# Altium PCB vt18_main_board.PcbDoc (part 1 of 2)
Units mil, origin at the board's own origin, x right, y up, seen from the top; angles counter-clockwise.
Board outline 5511.81 x 5236.22 mil, 4 copper layers (Top Layer, Internal Plane 1, Internal Plane 2, Bottom Layer), stack 30.635 mil thick; 230 components, 148 nets, 952 pads, 623 vias.
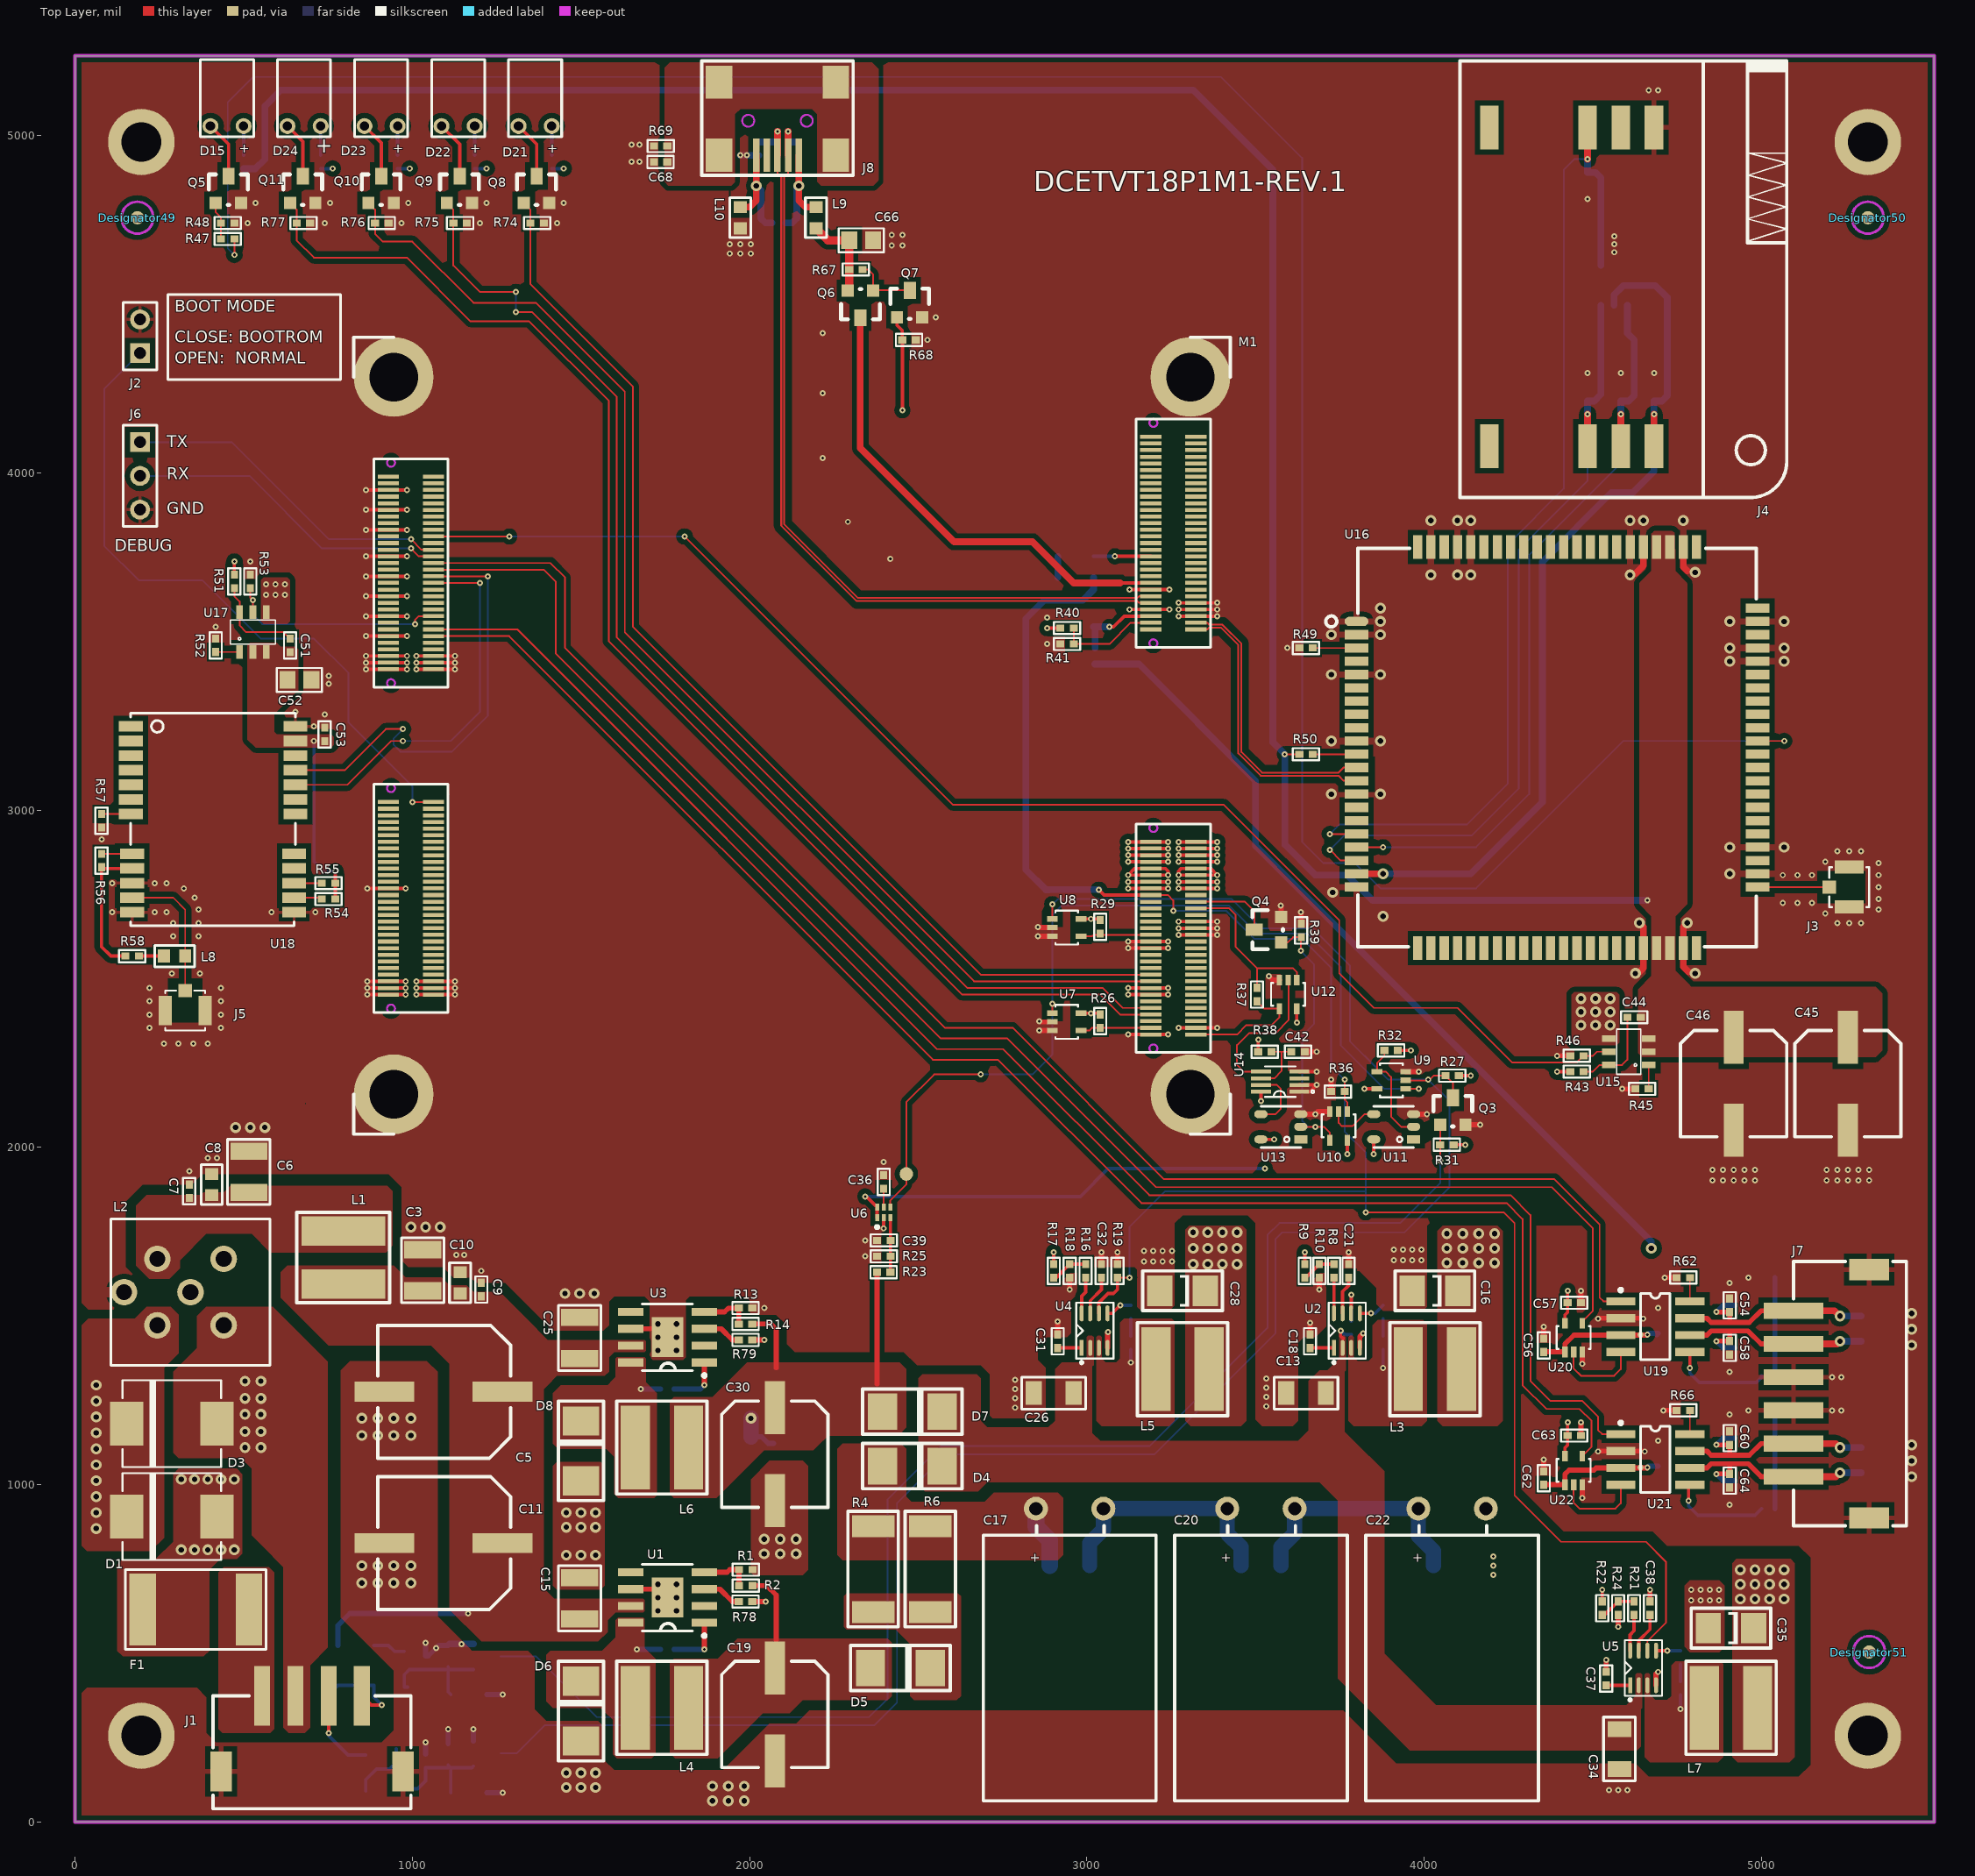
[diagram p0: Top Layer view]
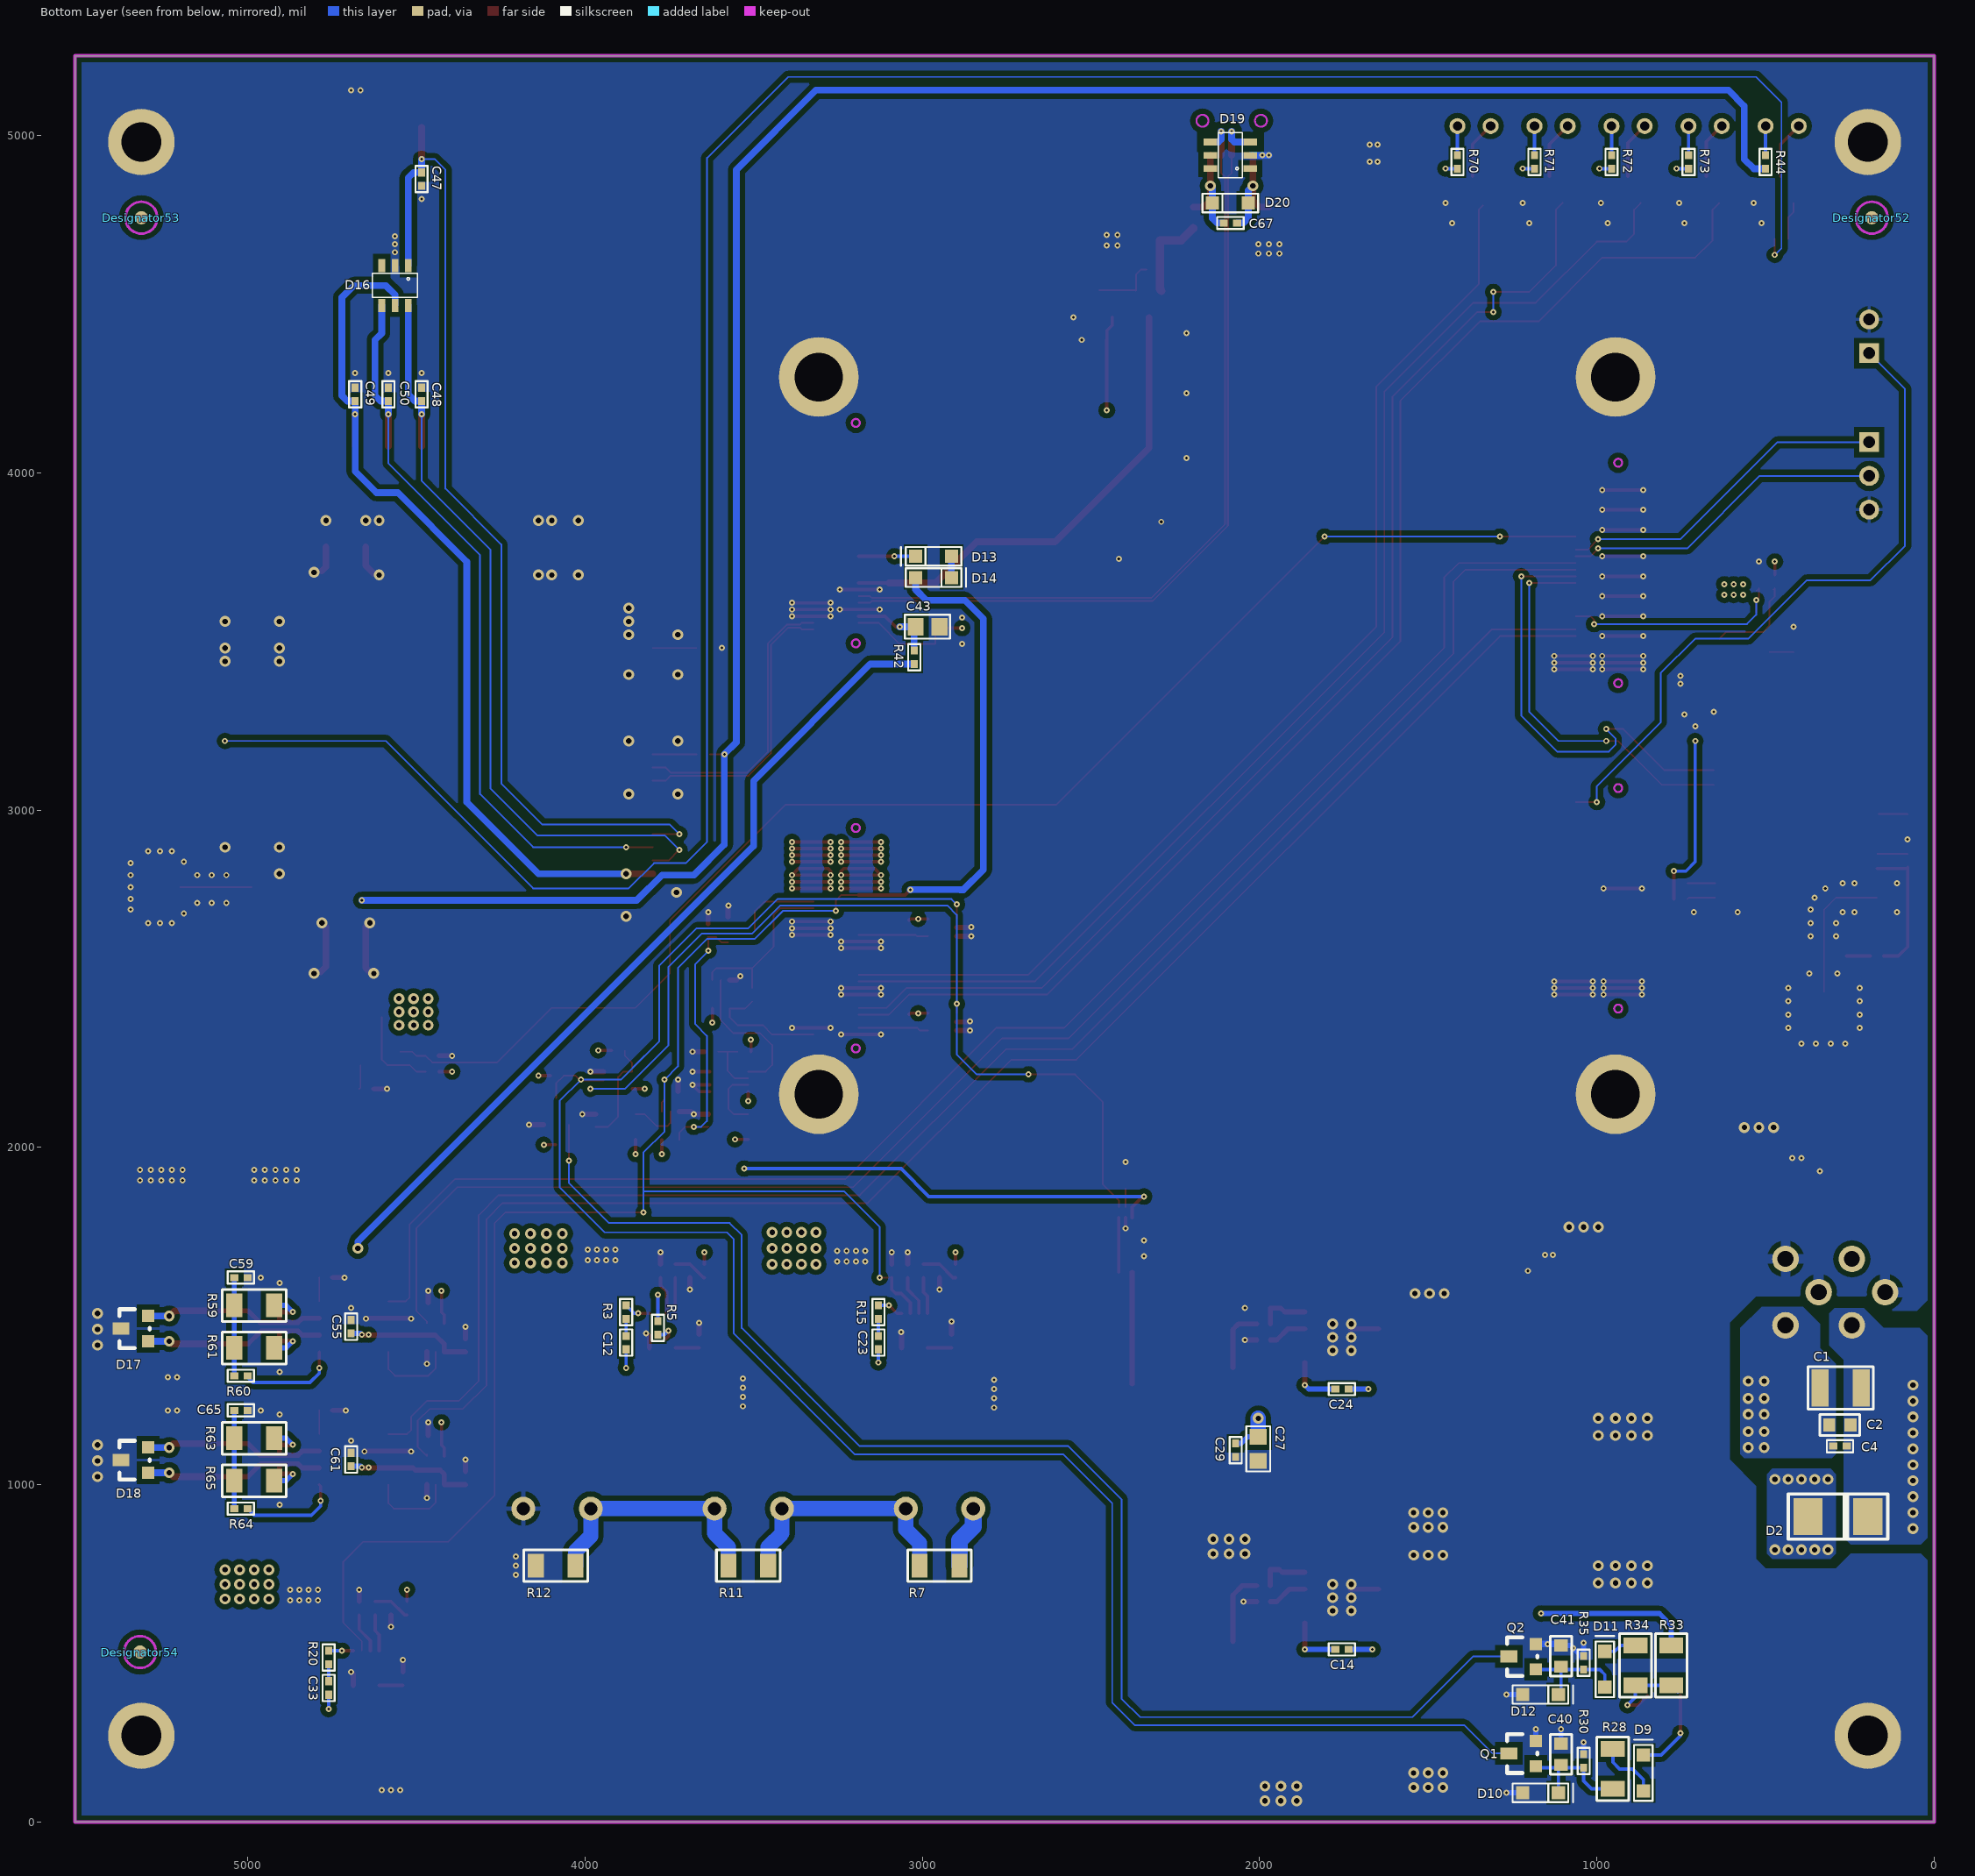
[diagram p1: Bottom Layer view, seen from below]
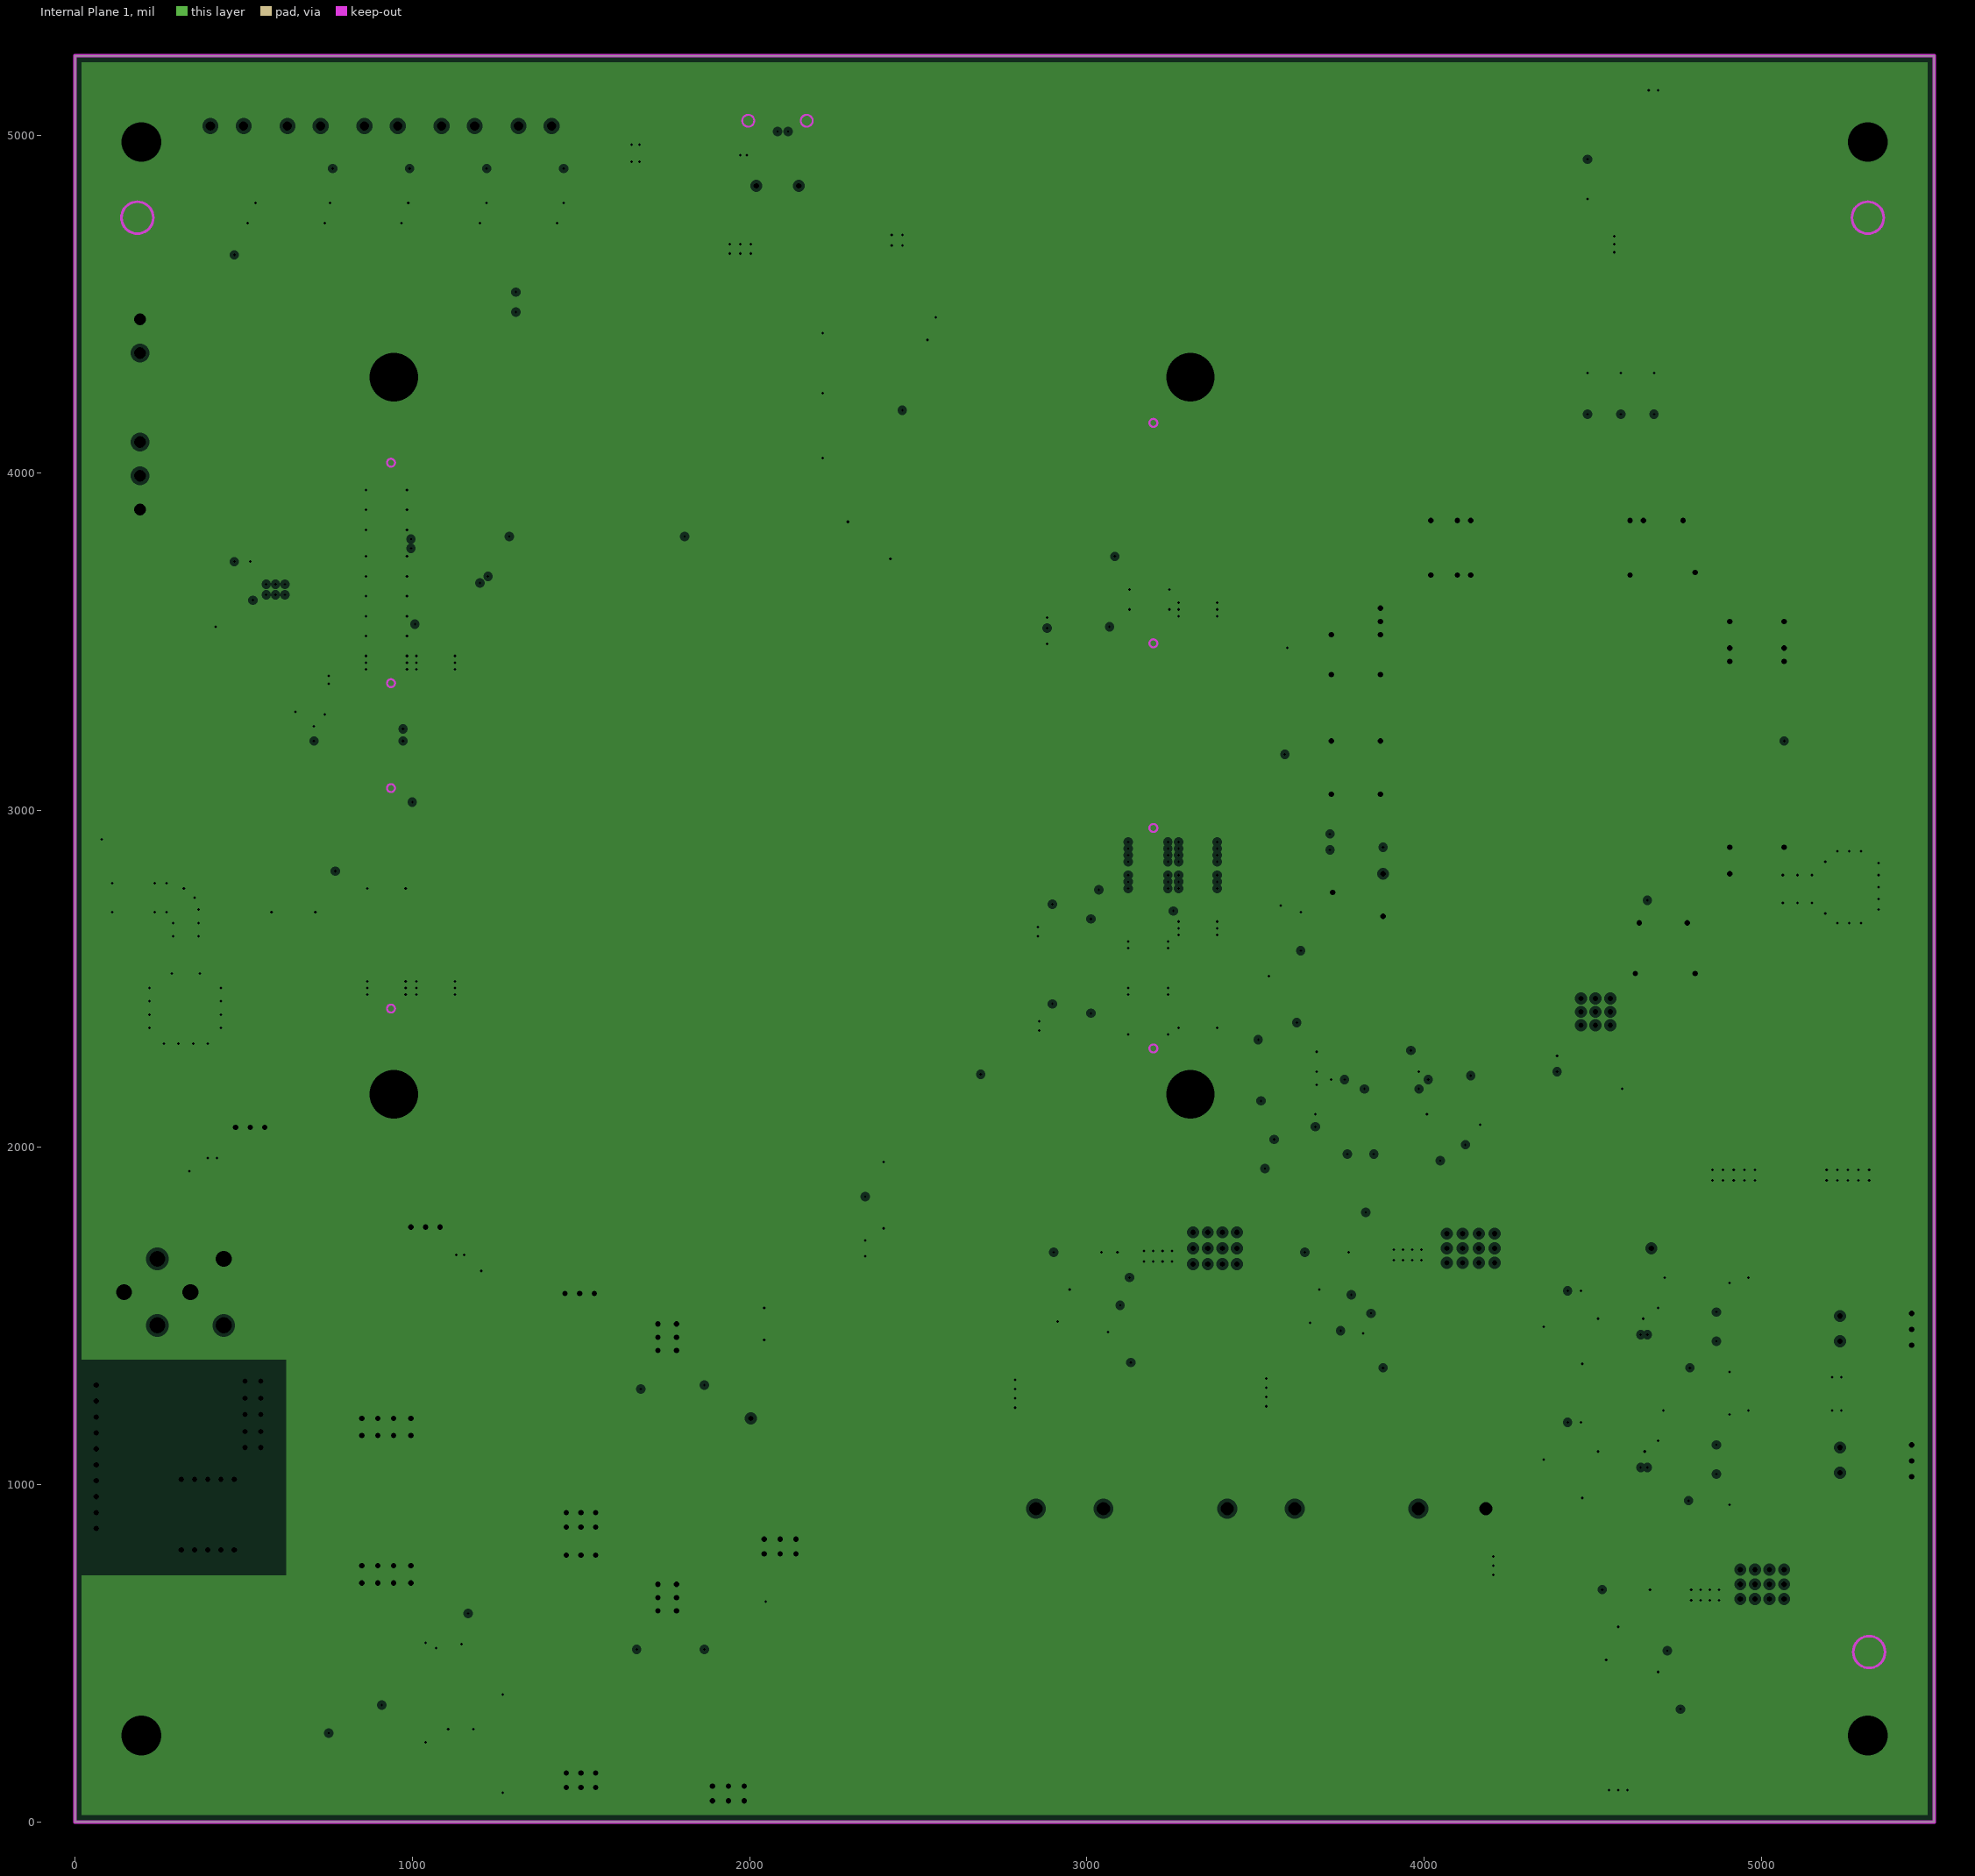
[diagram p2: Internal Plane 1, clearances drawn from the general rule]
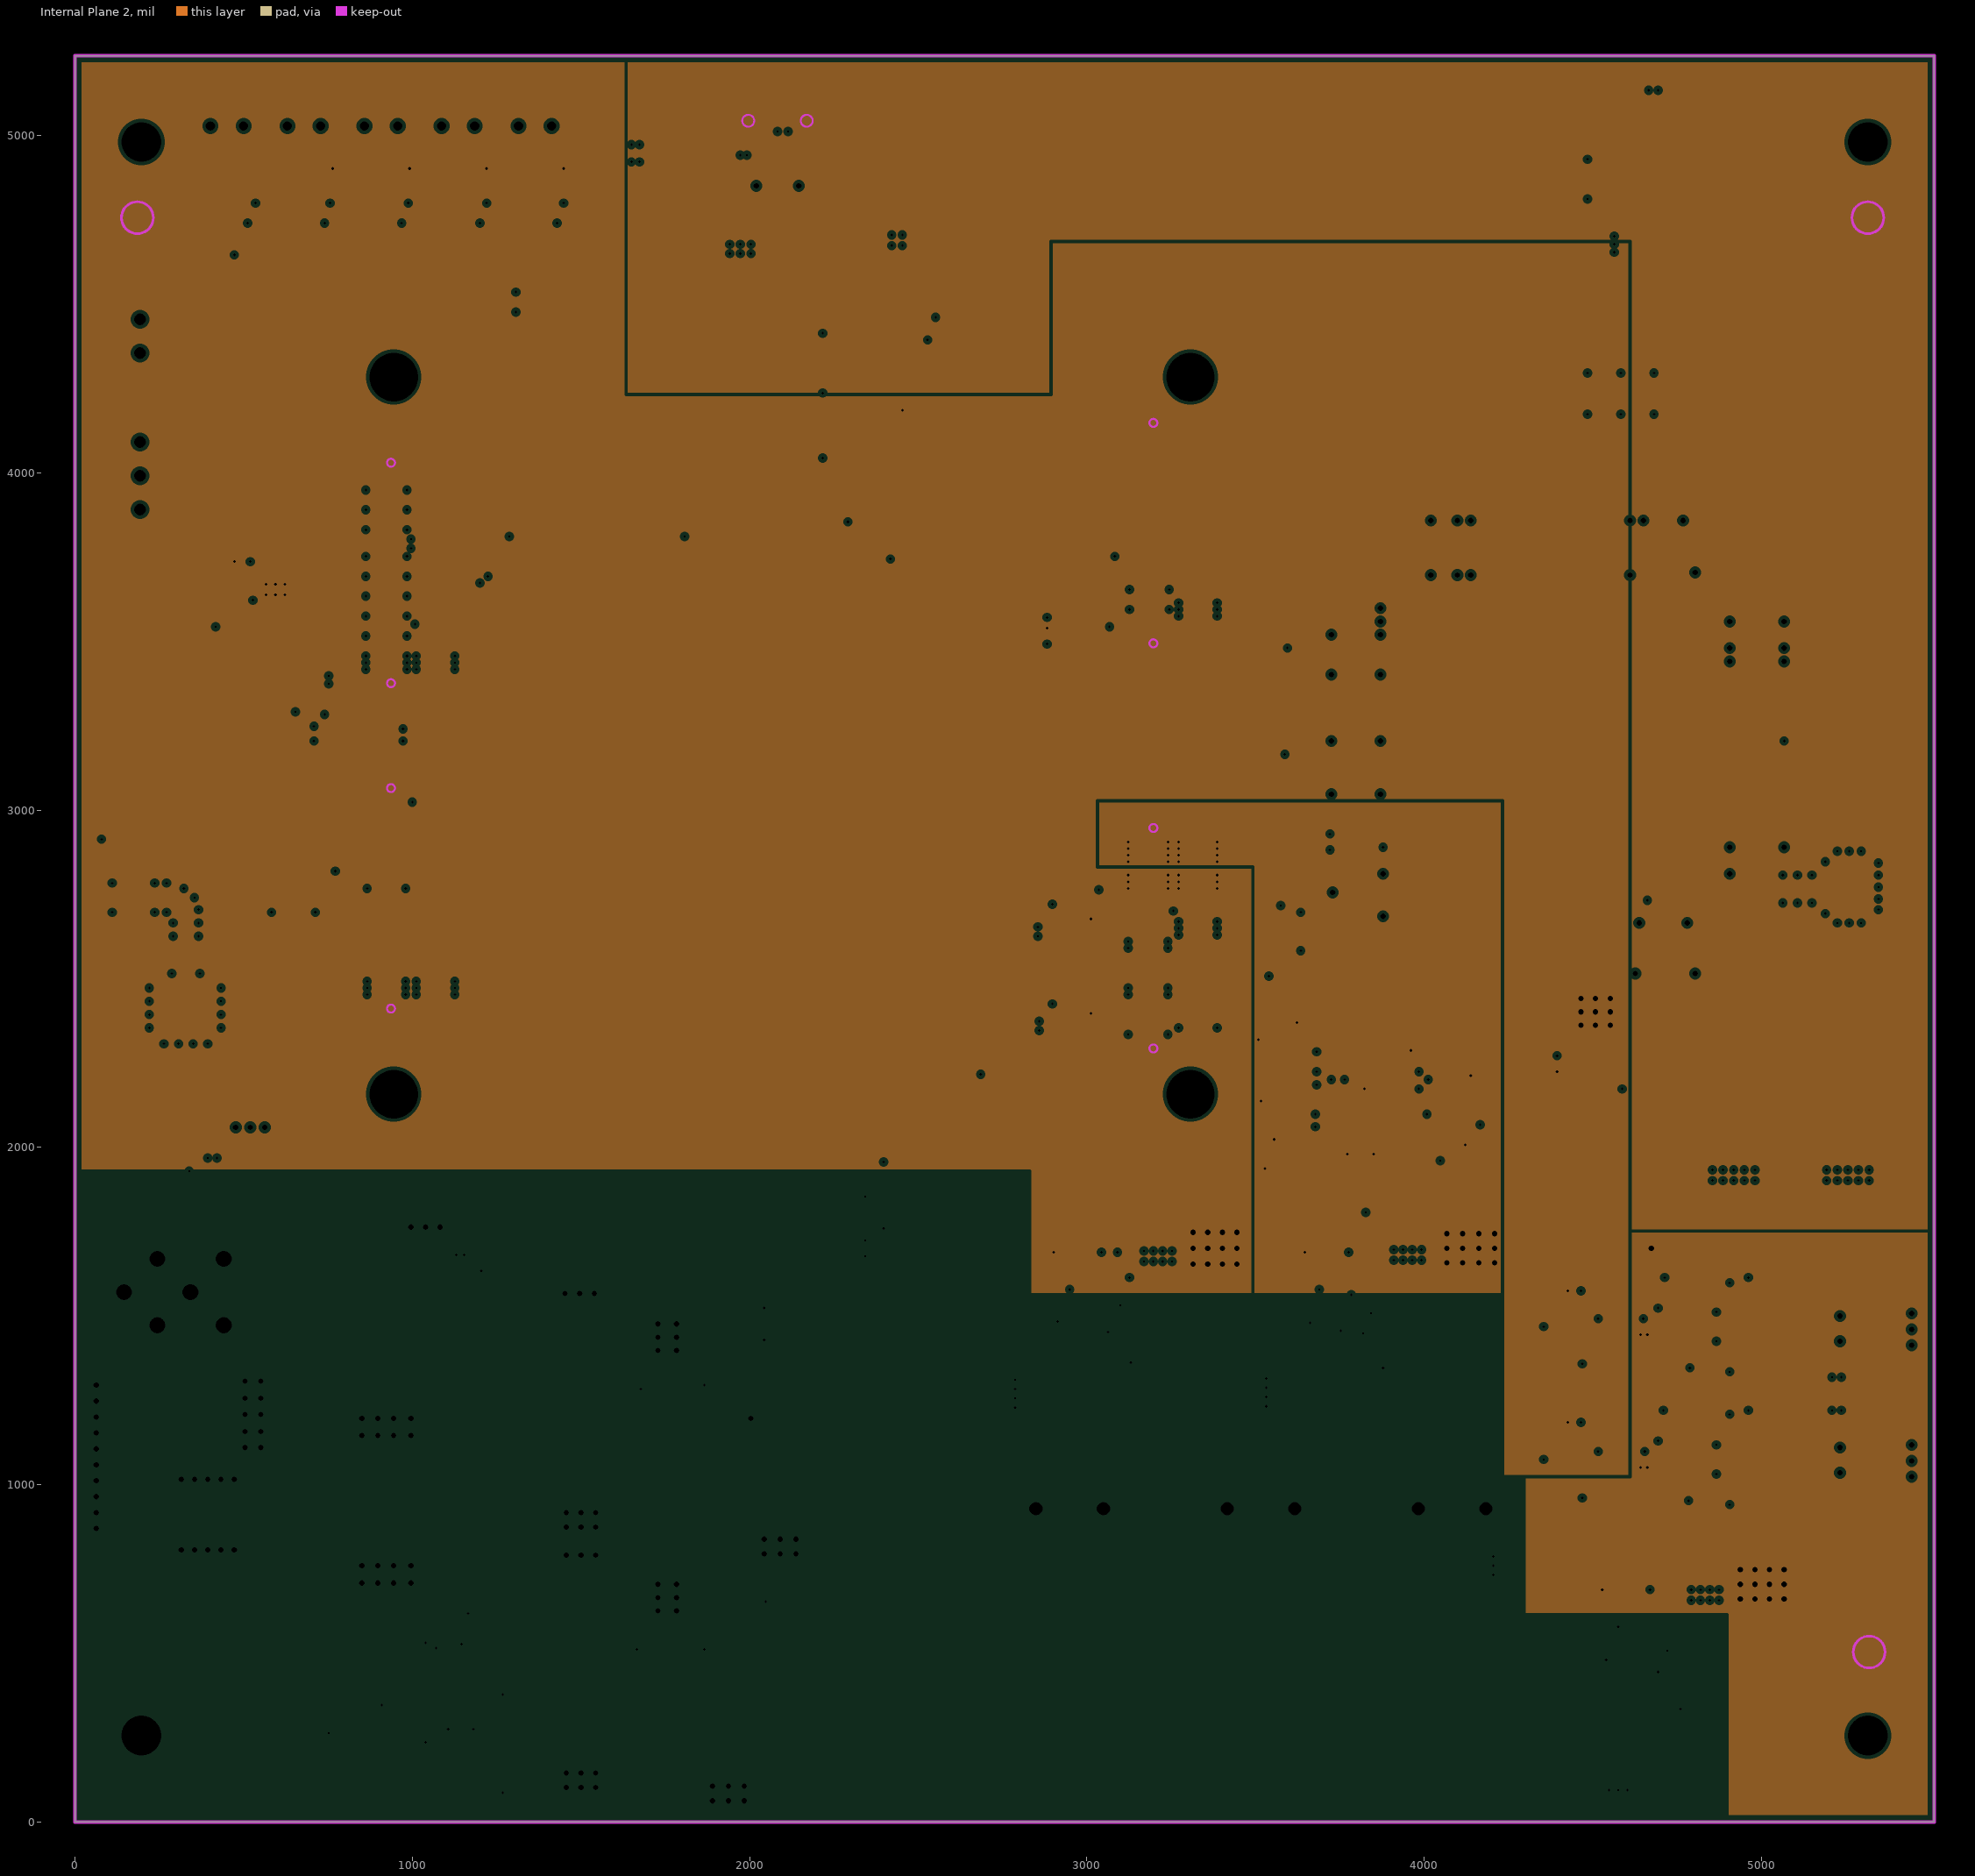
[diagram p3: Internal Plane 2, clearances drawn from the general rule]

## Layer stack, top to bottom
Top Solder: solder mask 0.4, Solder Resist, Dk 3.5
Top Layer: signal copper 1.4
Dielectric 1: core 10, FR-4, Dk 4.2
Internal Plane 1: plane copper 1.4173
Dielectric 3: prepreg 5, Dk 4.2
Internal Plane 2: plane copper 1.4173
Dielectric 2: core 10, Dk 4.2
Bottom Layer: signal copper 1.4
Bottom Solder: solder mask 0.4, Solder Resist, Dk 3.5

## Board outline
0,0 0,5236.22 5511.81,5236.22 5511.81,0

## Design rules (kind name [scope] priority, off if disabled: settings)
Clearance Clearance_5 [InNet('OTG_N') vs InNet('OTG_P')] p1: gap=3.7
Clearance Clearance_4 [InNet('USB-HOST_N') vs InNet('USB-HOST_P')] p2: gap=3.7
Clearance Clearance_3 [InDifferentialPairClass('USB') vs InPolygon AND InNet('GND')] p3: gap=20
Clearance Clearance_2 [InPolygon AND InNet('GND') vs InComponent('L1')] p4: gap=25
Clearance Clearance_1 [InPolygon AND InNet('GND')] p5: gap=15
Clearance [All] p6: gap=5
ComponentClearance [All] p1: gap=0 collisioncheckmode=3 verticalgap=0 showdistances=FALSE
DiffPairsRouting DiffPairsRouting_1 [InDifferentialPairClass('CAN')] p1: maxlimit=10 minlimit=10 mostfreqgap=10 toplayer_minwidth=10 toplayer_maxwidth=20 toplayer_prefwidth=15 bottomlayer_minwidth=10 bottomlayer_maxwidth=20 bottomlayer_prefwidth=15 maxuncoupledlength=500
DiffPairsRouting [InDifferentialPairClass('USB')] p2: maxlimit=3.7 minlimit=3.7 mostfreqgap=3.7 toplayer_minwidth=5.3 toplayer_maxwidth=5.3 toplayer_prefwidth=5.3 bottomlayer_minwidth=5.3 bottomlayer_maxwidth=5.3 bottomlayer_prefwidth=5.3 maxuncoupledlength=500
MinimumSolderMaskSliver [All] p1: minsoldermaskwidth=0
PlaneClearance PlaneClearance_2 [InComponent('L2')] p1: clearance=40
PlaneClearance PlaneClearance_1 [InPadClass('MT')] p2: clearance=39.37
PlaneClearance [All] p3: clearance=10
PlaneConnect PlaneConnect_4 [InComponent('L2')] p1: planeconnectstyle=Relief reliefexpansion=20 reliefentries=4 reliefconductorwidth=20 reliefairgap=20
PlaneConnect PlaneConnect_3 [InPadClass('MT')] p2: planeconnectstyle=Direct reliefexpansion=20 reliefentries=4 reliefconductorwidth=10 reliefairgap=10
PlaneConnect PlaneConnect_1 [IsVia] p3: planeconnectstyle=Direct reliefexpansion=20 reliefentries=4 reliefconductorwidth=10 reliefairgap=10
PlaneConnect [All] p4: planeconnectstyle=Relief reliefexpansion=10 reliefentries=4 reliefconductorwidth=10 reliefairgap=20
PolygonConnect PolygonConnect_5 [InComponent('C22') OR InComponent('J4') OR (InComponent('J1') AND NOT InNet('PGND')) OR InComponent('J7')] p1: connectstyle=Relief reliefconductorwidth=15 reliefentries=4 polygonreliefangle="90 Angle" airgapwidth=15
PolygonConnect PolygonConnect_4 [InComponent('J2') OR InComponent('J6') OR InComponent('D15') OR InComponent('D24') OR InComponent('D23') OR InComponent('D22') OR InComponent('D21')] p2: connectstyle=Relief reliefconductorwidth=10 reliefentries=4 polygonreliefangle="90 Angle" airgapwidth=10
PolygonConnect PolygonConnect_3 [InComponent('U16') AND NOT(InNet('M3V3'))] p3: connectstyle=Relief reliefconductorwidth=20 reliefentries=4 polygonreliefangle="90 Angle" airgapwidth=15
PolygonConnect PolygonConnect_2 [InComponent('U18')] p4: connectstyle=Relief reliefconductorwidth=10 reliefentries=4 polygonreliefangle="90 Angle" airgapwidth=10
PolygonConnect PolygonConnect_1 [InComponent('L2') vs (Not InNet('NetC1_1')) AND (NOT InNet('PGND')) AND  (NOT InNet('NetC6_1'))] p5: connectstyle=Relief reliefconductorwidth=30 reliefentries=4 polygonreliefangle="90 Angle" airgapwidth=15
PolygonConnect [All] p6: connectstyle=Direct reliefconductorwidth=10 reliefentries=4 polygonreliefangle="90 Angle" airgapwidth=10
RoutingVias [All] p1: holewidth=8 width=18 viastyle="Through Hole" minholewidth=8 minwidth=18 maxholewidth=20 maxwidth=40
SilkToSilkClearance [All] p1: silktosilkclearance=0
SilkToSolderMaskClearance [IsPad] p1: minsilkscreentomaskgap=0 clearancetoexposedcopper=TRUE
SolderMaskExpansion [All] p1: expansion=4
Width [All] p1: maxlimit=200 minlimit=4.7 preferedwidth=5 minimp=50.000000 maximp=50.000000 favimp=50.000000
23 further rules are at their usual default settings.

## Classes and differential pairs
pad class MT: Free-MT1 Free-MT2 Free-MT3 Free-MT4 M1-MT5 M1-MT6 M1-MT7 M1-MT8
differential pair class CAN: CAN1 CAN2
differential pair class USB: OTG USB-HOST
component class 01-POWER-FILTER: C1 C2 C3 C4 C5 C6 C7 C8 C9 C10 C11 D1 D2 D3 F1 J1 L1 L2
component class 02-POWER: C12 C13 C14 C15 C16 C17 C18 C19 C20 C21 C22 C23 C24 C25 C26 C27 C28 C29 C30 C31 C32 C33 C34 C35 C36 C37 C38 C39 D4 D5 D6 D7 D8 L3 L4 L5 L6 L7 R1 R2 R3 R4 R5 R6 R7 R8 R9 R10 R11 R12 R13 R14 R15 R16 R17 R18 R19 R20 R21 R22 R23 R24 R25 R26 R78 R79 U1 U2 U3 U4 U5 U6 U7
component class 03-POWER_CTRL: C40 C41 C42 D9 D10 D11 D12 Q1 Q2 Q3 Q4 R27 R28 R29 R30 R31 R32 R33 R34 R35 R36 R37 R38 R39 U8 U9 U10 U11 U12 U13 U14
component class 04-CPU_BOARD: C43 D13 D14 J2 M1 R40 R41 R42
component class 05-MODEM: C44 C45 C46 C47 C48 C49 C50 D15 D16 J3 J4 Q5 R43 R44 R45 R46 R47 R48 R49 R50 U15 U16
component class 06-GPS: C51 C52 C53 J5 L8 R51 R52 R53 R54 R55 R56 R57 R58 U17 U18
component class 07-CAN&UART: C54 C55 C56 C57 C58 C59 C60 C61 C62 C63 C64 C65 D17 D18 J6 J7 R59 R60 R61 R62 R63 R64 R65 R66 U19 U20 U21 U22
component class 08-USB: C66 C67 C68 D19 D20 J8 L9 L10 Q6 Q7 R67 R68 R69
component class 09-LED: D21 D22 D23 D24 Q8 Q9 Q10 Q11 R70 R71 R72 R73 R74 R75 R76 R77
differential pair CAN1: +CAN1_P -CAN1_N
differential pair CAN2: +CAN2_P -CAN2_N
differential pair OTG: +OTG_P -OTG_N
differential pair USB-HOST: +USB-HOST_P -USB-HOST_N

## Components (designator, comment, footprint, x,y, rotation, side; value= is the part's Value field where it differs from the comment)
C1 "10uF/50V" 1210 216.54,1287.4 r0 bottom
C2 "0.22uF/50V" 0603 279.53,1177.17 r270 bottom
C3 "10uF/50V" 1210 1031.5,1574.8 r90 top
C4 "1000pF/50V" 0402 279.53,1114.17 r180 bottom
C5 "220uF/50V" DL-10*10.5 1094.49,1275.59 r270 top
C6 "10uF/50V" 1210 515.75,1866.14 r90 top
C7 "1000pF/50V" 0402 338.58,1870.08 r270 top
C8 "0.22uF/50V" 0603 405.51,1889.76 r180 top
C9 "1000pF/50V" 0402 1204.72,1578.74 r270 top
C10 "0.22uF/50V" 0603 1141.73,1598.43 r180 top
C11 "220uF/50V" DL-10*10.5 1094.49,826.77 r270 top
C12 "0.1uF/50V" 0402 3877.95,1421.26 r270 bottom
C13 "10uF/16V" 1206 3590.55,1271.65 r0 top
C14 "0.01uF/50V" 0402 1755.91,511.81 r180 bottom
C15 "10uF/50V" 1210 1496.06,602.36 r90 top
C16 "47uF/10V(tan)" 3528 4031.5,1574.8 r0 top
C17 "10F/2.7V" SUPERCAP 2948.82,929.13 r0 top
C18 "0.022uF/50V" 0402 3661.42,1425.2 r90 top
C19 "220uF/25V" DL-8*10.5 2074.8,318.9 r0 top
C20 "10F/2.7V" SUPERCAP 3515.75,929.13 r0 top
C21 "0.1uF/50V" 0402 3775.59,1633.86 r90 top
C22 "10F/2.7V" SUPERCAP 4082.68,929.13 r0 top
C23 "0.1uF/50V" 0402 3129.92,1421.26 r270 bottom
C24 "0.01uF/50V" 0402 1755.91,1283.46 r180 bottom
C25 "10uF/50V" 1210 1496.06,1374.02 r90 top
C26 "10uF/16V" 1206 2842.52,1271.65 r0 top
C27 "4.7uF/25V" 0805 2003.94,1070.87 r90 bottom
C28 "47uF/10V(tan)" 3528 3283.46,1574.8 r0 top
C29 "0.22uF/16V" 0402 2070.87,1102.36 r270 bottom
C30 "220uF/25V" DL-8*10.5 2074.8,1090.55 r0 top
C31 "0.022uF/50V" 0402 2913.39,1425.2 r90 top
C32 "0.1uF/50V" 0402 3043.31,1633.86 r90 top
C33 "0.1uF/50V" 0402 4759.84,397.45 r270 bottom
C34 "10uF/16V" 1206 4578.74,157.48 r90 top
C35 "47uF/10V(tan)" 3528 4909.45,574.8 r0 top
C36 "0.1uF/50V" 0402 2397.64,1897.64 r270 top
C37 "0.022uF/50V" 0402 4539.37,425.2 r90 top
C38 "0.1uF/50V" 0402 4669.29,633.86 r90 top
C39 "0.01uF/50V" 0402 2397.64,1724.41 r0 top
C40 "0.47uF/50V" 0603 1106.3,200.79 r0 bottom
C41 "0.47uF/50V" 0603 1106.3,492.13 r0 bottom
C42 "0.22uF/10V" 0402 3625.98,2283.46 r180 top
C43 "4.7uF/25V" 0805 3019.68,3543.31 r180 bottom
C44 "1uF/10V" 0402 4622.05,2385.83 r0 top
C45 "470uF/6.3V" DL-8*10.5 5255.91,2188.98 r0 top
C46 "470uF/6.3V" DL-8*10.5 4917.32,2188.98 r0 top
C47 "33pF/50V" 0402 4484.25,4870.08 r90 bottom
C48 "33pF/50V" 0402 4484.25,4232.28 r270 bottom
C49 "0.1uF/50V" 0402 4681.1,4232.28 r270 bottom
C50 "33pF/50V" 0402 4582.68,4232.28 r270 bottom
C51 "0.47uF/6.3V" 0402 637.8,3488.19 r270 top
C52 "10uF/10V" 0805 629.92,3385.83 r0 top
C53 "0.1uF/50V" 0402 740.16,3224.41 r270 top
C54 "56pF/50V" 0402 4905.51,1531.5 r90 top
C55 "0.1uF/50V" 0402 4692.91,1468.5 r270 bottom
C56 "0.1uF/50V" 0402 4354.33,1413.39 r270 top
C57 "0.1uF/50V" 0402 4444.88,1539.37 r180 top
C58 "56pF/50V" 0402 4905.51,1405.51 r90 top
C59 "1000pF(DNP)" 0402 5019.68,1614.17 r0 bottom
C60 "56pF/50V" 0402 4905.51,1137.8 r90 top
C61 "0.1uF/50V" 0402 4692.91,1074.8 r270 bottom
C62 "0.1uF/50V" 0402 4354.33,1019.69 r270 top
C63 "0.1uF/50V" 0402 4444.88,1145.67 r180 top
C64 "56pF/50V" 0402 4905.51,1011.81 r90 top
C65 "1000pF(DNP)" 0402 5019.68,1220.47 r0 bottom
C66 "10uF/10V" 0805 2366.14,4688.98 r180 top
C67 "0.1uF/50V" 0402 2086.61,4740.16 r180 bottom
C68 "0.1uF/50V" 0402 1736.22,4921.26 r180 top
D1 "SMDJ33CA" SMC 421.26,905.51 r0 top
D2 "MBRS260T3G" SMB 374.02,905.51 r180 bottom
D3 "5.0SMDJ36A" SMC 421.26,1181.1 r0 top
D4 "MBRS260T3G" SMB 2393.7,1055.12 r0 top
D5 "MBRS260T3G" SMB 2358.27,456.69 r0 top
D6 "MBRS260T3G" SMB 1500,240.16 r90 top
D7 "MBRS260T3G" SMB 2393.7,1216.54 r0 top
D8 "MBRS260T3G" SMB 1500,1011.81 r90 top
D9 "MM3Z6V2ST1G" SOD323F 862.2,145.67 r270 bottom
D10 "1N5819HW" 1N5819 1114.17,86.61 r0 bottom
D11 "MM3Z6V2ST1G" SOD323F 976.38,452.76 r270 bottom
D12 "1N5819HW" 1N5819 1114.17,377.95 r0 bottom
D13 "1N5819HW" 1N5819 3019.68,3751.97 r180 bottom
D14 "1N5819HW" 1N5819 2913.39,3688.98 r0 bottom
D15 "LED GREEN" LED-3MM 401.57,5027.56 r0 top locked
D16 "SRV05-4" SOT23-6 4523.62,4614.17 r0 bottom
D17 "PESD1CAN" PESD2CAN 5295.28,1425.2 r90 bottom
D18 "PESD1CAN" PESD2CAN 5295.28,1035.43 r90 bottom
D19 "SRV05-4" SOT23-6 2027.56,4901.57 r90 bottom
D20 "PESD5V0L1BA" SOD323 2086.61,4799.21 r0 bottom
D21 "LED GREEN" LED-3MM 1314.96,5027.56 r0 top locked
D22 "LED GREEN" LED-3MM 1086.61,5027.56 r0 top locked
D23 "LED GREEN" LED-3MM 858.27,5027.56 r0 top locked
D24 "LED GREEN" LED-3MM 629.92,5027.56 r0 top locked
Designator49 "Comment" MARK 185.04,4755.91 r0 top locked
Designator50 "Comment" MARK 5314.96,4755.91 r0 top locked
Designator51 "Comment" MARK 5318.9,503.94 r0 top locked
Designator52 "Comment" MARK 185.04,4755.91 r180 bottom locked
Designator53 "Comment" MARK 5314.96,4755.91 r180 bottom locked
Designator54 "Comment" MARK 5318.9,503.94 r180 bottom locked
F1 "1.85A/33V" 2920 200.79,629.92 r0 top
J1 "POWER IN" XH2.54-SMT-V-4P 555.12,374.02 r0 top
J2 "BOOT MODE" HDR1X2 192.91,4354.33 r90 top
J3 "MODEM ANT" ANT 5259.84,2771.65 r270 top
J4 "SIMCARD" SIM_CARD1 4681.1,4078.74 r270 top locked
J5 "GPS ANT" ANT 326.77,2405.51 r180 top
J6 "DEBUG UART" HDR1X3 192.91,4090.55 r270 top
J7 "CAN" XH2.54-SMT-V-6P 5094.49,1023.62 r90 top
J8 "USB OTG" MINIUSB-TYPEAB 2082.68,4940.94 r0 top locked
L1 "8.2uH/1.6A" IND-SMD-5.8*5.8 795.28,1673.23 r0 top
L2 "BNX003-01" BNX002-001 342.52,1570.87 r180 top
L3 "4.7uH/2A" IND-SMD-5.8*5.8 4031.5,1342.52 r90 top
L4 "8.2uH/1.6A" IND-SMD-5.8*5.8 1740.16,338.58 r90 top
L5 "4.7uH/2A" IND-SMD-5.8*5.8 3283.46,1342.52 r90 top
L6 "8.2uH/1.6A" IND-SMD-5.8*5.8 1740.16,1110.24 r90 top
L7 "4.7uH/2A" IND-SMD-5.8*5.8 4909.45,338.58 r90 top
L8 "27nH(DNP)" 0603 295.28,2566.93 r90 top
L9 "120ohm/100MHz 1A" 0603 2196.85,4755.91 r180 top
L10 "120ohm/100MHz 1A" 0603 1972.44,4755.91 r180 top
M1 "IMX6Q-CPU-BOARD" IMX6-CPU-BOARD 826.77,2039.37 r0 top locked
Q1 "S9014" NPN 1181.1,165.35 r90 bottom
Q2 "S9014" NPN 1181.1,452.76 r90 bottom
Q3 "S9014" NPN 4047.24,2066.93 r0 top
Q4 "BSS138P" NPN 3576.06,2607.67 r90 top
Q5 "S9014" NPN 417.32,4799.21 r0 top
Q6 "IRLML6402" MOSFET 2366.14,4539.37 r180 top
Q7 "BSS138P" NPN 2437.01,4460.63 r0 top
Q8 "BSS138P" NPN 1330.71,4799.21 r0 top
Q9 "BSS138P" NPN 1102.36,4799.21 r0 top
Q10 "BSS138P" NPN 870.08,4799.21 r0 top
Q11 "BSS138P" NPN 637.8,4799.21 r0 top
R1 "1K/1%" 0402 1988.63,748.03 r180 top
R2 "5.23K/1%" 0402 1988.63,700.79 r180 top
R3 "10" 0402 3877.95,1511.81 r270 bottom
R4 "20/1W" 2512 2366.14,622.05 r90 top
R5 "100K" 0402 3783.46,1464.57 r90 bottom
R6 "20/1W" 2512 2535.43,622.05 r90 top
R7 "560/0.25W" 1206 2889.76,759.84 r0 bottom
R8 "33K/1%" 0402 3732.28,1633.86 r90 top
R9 "40.2K/1%" 0402 3645.67,1633.86 r90 top
R10 "13K/1%" 0402 3688.98,1633.86 r90 top
R11 "560/0.25W" 1206 3456.69,759.84 r0 bottom
R12 "560/0.25W" 1206 4027.56,759.84 r0 bottom
R13 "1K/1%" 0402 1988.19,1523.62 r180 top
R14 "5.62K/1%" 0402 1988.19,1476.38 r180 top
R15 "10" 0402 3129.92,1511.81 r270 bottom
R16 "33K/1%" 0402 2996.06,1633.86 r90 top
R17 "40.2K/1%" 0402 2901.57,1633.86 r90 top
R18 "13K/1%" 0402 2948.82,1633.86 r90 top
R19 "10K" 0402 3090.55,1633.86 r270 top
R20 "10" 0402 4759.84,488 r270 bottom
R21 "33K/1%" 0402 4622.05,633.86 r90 top
R22 "40.2K/1%" 0402 4527.56,633.86 r90 top
R23 "13K/1%" 0402 2397.64,1629.92 r180 top
R24 "7.68K/1%" 0402 4574.8,633.86 r90 top
R25 "1K/1%" 0402 2397.64,1677.17 r0 top
R26 "10K" 0402 3039.37,2374.02 r90 top
R27 "47K" 0402 4082.68,2212.6 r0 top
R28 "15K(0.25W)" 1206 952.76,98.43 r90 bottom
R29 "10K" 0402 3039.37,2653.54 r90 top
R30 "47K" 0402 1039.37,181.1 r270 bottom
R31 "10K" 0402 4066.93,2007.87 r0 top
R32 "10K" 0402 3901.57,2287.4 r0 top
R33 "10K(0.25W)" 1206 779.53,523.62 r270 bottom
R34 "10K(0.25W)" 1206 885.83,405.51 r90 bottom
R35 "47K" 0402 1039.37,472.44 r270 bottom
R36 "10K" 0402 3744.09,2165.35 r0 top
R37 "0(DNP)" 0402 3503.94,2452.76 r90 top
R38 "10K" 0402 3527.56,2283.46 r180 top
R39 "4.7K" 0402 3635.12,2643.1 r270 top
R40 "4.7K" 0402 2940.94,3539.37 r0 top
R41 "0(DNP)" 0402 2940.94,3492.13 r0 top
R42 "0" 0402 3023.62,3452.76 r90 bottom
R43 "47K" 0402 4452.57,2224.41 r180 top
R44 "200" 0402 500,4921.26 r270 bottom
R45 "3.3K" 0402 4645.67,2173.23 r180 top
R46 "2.2K" 0402 4452.57,2271.65 r180 top
R47 "4.7K" 0402 452.76,4692.91 r0 top
R48 "47K" 0402 452.76,4740.16 r0 top
R49 "0" 0402 3649.61,3480.31 r180 top
R50 "0" 0402 3649.61,3165.35 r180 top
R51 "20K" 0402 472.44,3677.35 r90 top
R52 "1K" 0402 417.32,3488.19 r90 top
R53 "2.2K" 0402 519.68,3677.35 r90 top
R54 "0(DNP)" 0402 751.97,2736.22 r180 top
R55 "0(DNP)" 0402 751.97,2783.46 r180 top
R56 "0" 0402 78.74,2850.39 r270 top
R57 "0(DNP)" 0402 78.74,2968.5 r270 top
R58 "10(DNP)" 0402 169.29,2566.93 r0 top
R59 "62/(1/4W)(DNP)" 1206 4921.26,1531.5 r0 bottom
R60 "0(DNP)" 0402 5019.68,1322.83 r0 bottom
R61 "62(1/4W)(DNP)" 1206 5039.37,1405.51 r180 bottom
R62 "0" 0402 4767.72,1614.17 r0 top
R63 "62/(1/4W)" 1206 4921.26,1137.8 r0 bottom
R64 "0(DNP)" 0402 5019.68,929.13 r0 bottom
R65 "62(1/4W)" 1206 5039.37,1011.81 r180 bottom
R66 "0" 0402 4767.72,1220.47 r0 top
R67 "47K" 0402 2314.96,4602.36 r0 top
R68 "47K" 0402 2472.44,4393.7 r0 top
R69 "100" 0402 1736.22,4968.5 r0 top
R70 "200" 0402 1413.39,4921.26 r270 bottom
R71 "200" 0402 1185.04,4921.26 r270 bottom
R72 "200" 0402 956.69,4921.26 r270 bottom
R73 "200" 0402 728.35,4921.26 r270 bottom
R74 "4.7K" 0402 1370.08,4740.16 r0 top
R75 "4.7K" 0402 1141.73,4740.16 r0 top
R76 "4.7K" 0402 909.45,4740.16 r0 top
R77 "4.7K" 0402 677.17,4740.16 r0 top
R78 "DNP" 0402 1988.19,653.54 r180 top
R79 "DNP" 0402 1988.19,1429.13 r180 top
U1 "LM22676MR-ADJ" PSO8 1866.14,590.55 r90 top
U2 "MP1497DJ" TSOT23-8 3732.28,1405.51 r90 top
U3 "LM22676MR-ADJ" PSO8 1866.14,1362.2 r90 top
U4 "MP1497DJ" TSOT23-8 2984.25,1405.51 r90 top
U5 "MP1497DJ" TSOT23-8 4610.24,405.51 r90 top
U6 "TPS3895P" SON 2377.95,1791.34 r0 top
U7 "NC7SP125P5X" SC70 2897.64,2397.64 r270 top
U8 "NC7SP126P5X" SC70 2897.64,2677.17 r270 top
U9 "NC7SP126P5X" SC70 3944.88,2173.23 r90 top
U10 "NC7SP125P5X" SC70 3771.65,2106.3 r180 top
U11 "74HC1G04" SOT753 3968.5,2023.62 r180 top
U12 "NC7SP08P5X" SC70 3622.05,2496.06 r180 top
U13 "74HC1G04" SOT753 3633.86,2023.62 r180 top
U14 "NC7SZ74K8X" US8 3625.98,2165.35 r90 top
U15 "TPS27081ADDC" SOT23-6 4665.35,2244.09 r90 top
U16 "SIM7600CE" SIM7600 3803.15,3559.06 r0 top locked
U17 "TPS27081ADDC" SOT23-6 488.19,3468.5 r0 top
U18 "N303" NEO-6 165.35,3248.03 r180 top
U19 "TJA1040T" SO8 4685.04,1468.5 r270 top
U20 "NLSV1T34DFT2G" SC70 4417.32,1393.7 r0 top
U21 "TJA1040T" SO8 4685.04,1074.8 r270 top
U22 "NLSV1T34DFT2G" SC70 4417.32,1000 r0 top

## Footprints (in the part's own frame and the unit in brackets; to place one, negate y for a bottom-side part, rotate by r counter-clockwise, add the part's x,y. Pads: shape width x height; smd on the part's side, far side on the other; paste and mask are expansions set on the pad)
1N5819 [mm]
  rect 1x1 smd: 1(2.7,0) 2(0,0)
  silkscreen extent -1.1,-0.7 3.45,0.7
0402 [mil] "Chip Capacitor, Body 1.0x0.5mm, IPC High Density"
  rect 24x21 smd: 1(20.13,0) 2(-19.87,0)
  silkscreen extent -39,-18 39,18
0603 [mm]
  rect 1x0.9 smd: 1(0,0.8) 2(0,-0.8)
  silkscreen extent -0.8,-1.5 0.8,1.5
0805 [mm]
  rect 1.2x1.3 smd: 1(0,0) 2(1.8,0)
  silkscreen extent -0.8,-0.9 2.6,0.9
1206 [mm]
  rect 1.2x1.8 smd: 1(0,0) 2(3,0)
  silkscreen extent -0.9,-1.2 3.9,1.2
1210 [mm]
  rect 1.3x2.8 smd: 1(0,0) 2(3.1,0)
  silkscreen extent -0.9,-1.6 4,1.6
2512 [mm]
  rect 1.65x3.2 smd: 1(0,0) 2(6.48,0)
  silkscreen extent -1.1,-1.9 7.6,1.9
2920 [mm]
  rect 2x5.4 smd: 1(0,0) 2(8,0)
  silkscreen extent -1.3,-3 9.3,3
3528 [mil]
  rect 75x90 smd: 1(67.5,0) 2(-67.5,0)
  silkscreen extent -118,-59 118,59
ANT [mm]
  rect 1x1 smd: 1(0,-1.5)
  rect 1x2.2 smd: 2(1.5,0) 3(-1.5,0)
  silkscreen extent -1.5,-1.5 1.5,1.5
BNX002-001 [mm]
  round 2 hole 1.2: 1(2.5,2.5) 2(-2.5,2.5) 3(2.5,-2.5) 4(5,0) 5(0,0) 6(-2.5,-2.5)
  silkscreen extent -6,-5.5 6,5.5
DL-8*10.5 [mm]
  rect 1.5x4 smd: 1(0,3.5) 2(0,-3.5)
  silkscreen extent -4,-4 4,4
DL-10*10.5 [mm]
  rect 1.5x4.5 smd: 1(0,4.4) 2(0,-4.5)
  silkscreen extent -5,-5 5,5
HDR1X2 [mm] "Connector; Header; 2 Position"
  rect 1.5x1.5 hole 0.9: 1(0,0)
  round 1.5 hole 0.9: 2(2.54,0)
  silkscreen extent -1.27,-1.27 3.81,1.27
HDR1X3 [mm] "Connector; Header; 3 Position"
  rect 1.5x1.5 hole 0.9: 1(0,0)
  round 1.5 hole 0.9: 2(2.54,0) 3(5.08,0)
  silkscreen extent -1.27,-1.27 6.35,1.27
IMX6-CPU-BOARD [mm]
  rect 1.6x0.3 smd: A1(2.6,49.5) A2(6,49.5) A3(2.6,49) A4(6,49) A5(2.6,48.5) A6(6,48.5) A7(2.6,48) A8(6,48) A9(2.6,47.5) A10(6,47.5) A11(2.6,47) A12(6,47) A13(2.6,46.5) A14(6,46.5) A15(2.6,46) A16(6,46) A17(2.6,45.5) A18(6,45.5) A19(2.6,45) A20(6,45) A21(2.6,44.5) A22(6,44.5) A23(2.6,44) A24(6,44) A25(2.6,43.5) A26(6,43.5) A27(2.6,43) A28(6,43) A29(2.6,42.5) A30(6,42.5) A31(2.6,42) A32(6,42) A33(2.6,41.5) A34(6,41.5) A35(2.6,41) A36(6,41) A37(2.6,40.5) A38(6,40.5) A39(2.6,40) A40(6,40) A41(2.6,39.5) A42(6,39.5) A43(2.6,39) A44(6,39) A45(2.6,38.5) A46(6,38.5) A47(2.6,38) A48(6,38) A49(2.6,37.5) A50(6,37.5) A51(2.6,37) A52(6,37) A53(2.6,36.5) A54(6,36.5) A55(2.6,36) A56(6,36) A57(2.6,35.5) A58(6,35.5) A59(2.6,35) A60(6,35) B1(2.6,25) B2(6,25) B3(2.6,24.5) B4(6,24.5) B5(2.6,24) B6(6,24) B7(2.6,23.5) B8(6,23.5) B9(2.6,23) B10(6,23) B11(2.6,22.5) B12(6,22.5) B13(2.6,22) B14(6,22) B15(2.6,21.5) B16(6,21.5) B17(2.6,21) B18(6,21) B19(2.6,20.5) B20(6,20.5) B21(2.6,20) B22(6,20) B23(2.6,19.5) B24(6,19.5) B25(2.6,19) B26(6,19) B27(2.6,18.5) B28(6,18.5) B29(2.6,18) B30(6,18) B31(2.6,17.5) B32(6,17.5) B33(2.6,17) B34(6,17) B35(2.6,16.5) B36(6,16.5) B37(2.6,16) B38(6,16) B39(2.6,15.5) B40(6,15.5) B41(2.6,15) B42(6,15) B43(2.6,14.5) B44(6,14.5) B45(2.6,14) B46(6,14) B47(2.6,13.5) B48(6,13.5) B49(2.6,13) B50(6,13) B51(2.6,12.5) B52(6,12.5) B53(2.6,12) B54(6,12) B55(2.6,11.5) B56(6,11.5) B57(2.6,11) B58(6,11) B59(2.6,10.5) B60(6,10.5) C1(60,52.5) C2(63.4,52.5) C3(60,52) C4(63.4,52) C5(60,51.5) C6(63.4,51.5) C7(60,51) C8(63.4,51) C9(60,50.5) C10(63.4,50.5) C11(60,50) C12(63.4,50) C13(60,49.5) C14(63.4,49.5) C15(60,49) C16(63.4,49) C17(60,48.5) C18(63.4,48.5) C19(60,48) C20(63.4,48) C21(60,47.5) C22(63.4,47.5) C23(60,47) C24(63.4,47) C25(60,46.5) C26(63.4,46.5) C27(60,46) C28(63.4,46) C29(60,45.5) C30(63.4,45.5) C31(60,45) C32(63.4,45) C33(60,44.5) C34(63.4,44.5) C35(60,44) C36(63.4,44) C37(60,43.5) C38(63.4,43.5) C39(60,43) C40(63.4,43) C41(60,42.5) C42(63.4,42.5) C43(60,42) C44(63.4,42) C45(60,41.5) C46(63.4,41.5) C47(60,41) C48(63.4,41) C49(60,40.5) C50(63.4,40.5) C51(60,40) C52(63.4,40) C53(60,39.5) C54(63.4,39.5) C55(60,39) C56(63.4,39) C57(60,38.5) C58(63.4,38.5) C59(60,38) C60(63.4,38) D1(60,22) D2(63.4,22) D3(60,21.5) D4(63.4,21.5) D5(60,21) D6(63.4,21) D7(60,20.5) D8(63.4,20.5) D9(60,20) D10(63.4,20) D11(60,19.5) D12(63.4,19.5) D13(60,19) D14(63.4,19) D15(60,18.5) D16(63.4,18.5) D17(60,18) D18(63.4,18) D19(60,17.5) D20(63.4,17.5) D21(60,17) D22(63.4,17) D23(60,16.5) D24(63.4,16.5) D25(60,16) D26(63.4,16) D27(60,15.5) D28(63.4,15.5) D29(60,15) D30(63.4,15) D31(60,14.5) D32(63.4,14.5) D33(60,14) D34(63.4,14) D35(60,13.5) D36(63.4,13.5) D37(60,13) D38(63.4,13) D39(60,12.5) D40(63.4,12.5) D41(60,12) D42(63.4,12) D43(60,11.5) D44(63.4,11.5) D45(60,11) D46(63.4,11) D47(60,10.5) D48(63.4,10.5) D49(60,10) D50(63.4,10) D51(60,9.5) D52(63.4,9.5) D53(60,9) D54(63.4,9) D55(60,8.5) D56(63.4,8.5) D57(60,8) D58(63.4,8) D59(60,7.5) D60(63.4,7.5)
  round 6 hole 3.65: MT5(3,57) MT6(3,3) MT7(63,3) MT8(63,57)
  round 6 on Top Paste: ""(3,3) ""(3,57) ""(63,3) ""(63,57)
  Keep-Out Layer circle w0.15: c2.8,33.95 r0.3
  Keep-Out Layer circle w0.15: c2.8,50.55 r0.3
  Keep-Out Layer circle w0.15: c2.8,9.45 r0.3
  Keep-Out Layer circle w0.15: c2.8,26.05 r0.3
  Keep-Out Layer circle w0.15: c60.2,36.95 r0.3
  Keep-Out Layer circle w0.15: c60.2,53.55 r0.3
  Keep-Out Layer circle w0.15: c60.2,6.45 r0.3
  Keep-Out Layer circle w0.15: c60.2,23.05 r0.3
  silkscreen extent 0,0 66,60
IND-SMD-5.8*5.8 [mm]
  rect 6.3x2.2 smd: 1(0,2) 2(0,-2)
  silkscreen extent -3.5,-3.4 3.5,3.4
LED-3MM [mm]
  round 1.2 hole 0.7: 1(2.5,0) 2(0,0)
  silkscreen extent -0.75,-0.8 3.25,5
MARK [mm]
  round 1 smd paste-0.5 mask+0.6: ""(0,0)
  Keep-Out Layer circle w0.2: c0,0 r1.2
MINIUSB-TYPEAB [mm]
  rect 0.5x2.5 smd: 1(1.6,0) 2(0.8,0) 3(0,0) 4(-0.8,0) 5(-1.6,0)
  rect 2x2.5 smd: 6(-4.4,5.5) 7(-4.4,0) 8(4.4,0) 9(4.4,5.5)
  Keep-Out Layer circle w0.152: c2.2,2.6 r0.45
  Keep-Out Layer circle w0.152: c-2.2,2.6 r0.45
  silkscreen extent -5.7,-1.5 5.7,7.1
MOSFET [mil]
  rect 36x36 smd: 1(0,0) 2(75,0)
  rect 36x50 smd: 3(38,80)
  silkscreen extent -20,-5 95,85
NEO-6 [mm]
  rect 1.8x0.8 smd: 1(0,0) 2(0,1.1) 3(0,2.2) 4(0,3.3) 5(0,4.4) 6(0,5.5) 7(0,6.6) 8(-0.1,9.6) 9(-0.1,10.7) 10(-0.1,11.8) 11(-0.1,12.9) 12(-0.1,14) 13(-12.3,14) 14(-12.3,12.9) 15(-12.3,11.8) 16(-12.3,10.7) 17(-12.3,9.6) 18(-12.4,6.6) 19(-12.4,5.5) 20(-12.4,4.4) 21(-12.4,3.3) 22(-12.4,2.2) 23(-12.4,1.1) 24(-12.4,0)
  silkscreen extent -12.4,-1 0,15
NPN [mil]
  rect 36x50 smd: 1(38,80)
  rect 36x36 smd: 2(0,0) 3(75,0)
  silkscreen extent -20,-5 95,85
PESD2CAN [mil]
  rect 36x36 smd: 1(0,0) 2(75,0)
  rect 36x50 smd: 3(38,80)
  silkscreen extent -20,-5 95,85
PSO8 [mm]
  rect 0.6x1.9 smd: 1(0,0) 2(1.27,0) 3(2.54,0) 4(3.81,0) 5(3.81,5.56) 6(2.54,5.56) 7(1.27,5.56) 8(0,5.56)
  rect 3x2.4 smd: 9(1.9,2.78)
  silkscreen extent -1.1,-0.12 4.4,4.7
SC70 [mil]
  rect 16x32 smd: 1(0,0) 2(25.6,0) 3(51.2,0) 4(51.2,85) 5(0,85)
  silkscreen extent -25,9 76,76
SIM7600 [mm]
  oval 1.8x0.7 smd: 1(-0.1,0)
  rect 1.8x0.7 smd: 2(-0.1,-1) 3(-0.1,-2) 4(-0.1,-3) 5(-0.1,-4) 6(-0.1,-5) 7(-0.1,-6) 8(-0.1,-7) 9(-0.1,-8) 10(-0.1,-9) 11(-0.1,-10) 12(-0.1,-11) 13(-0.1,-12) 14(-0.1,-13) 15(-0.1,-14) 16(-0.1,-15) 17(-0.1,-16) 18(-0.1,-17) 19(-0.1,-18) 20(-0.1,-19) 41(30.1,-19) 42(30.1,-18) 43(30.1,-17) 44(30.1,-16) 45(30.1,-15) 46(30.1,-14) 47(30.1,-13) 48(30.1,-12) 49(30.1,-11) 50(30.1,-10) 51(30.1,-9) 52(30.1,-8) 53(30.1,-7) 54(30.1,-6) 55(30.1,-5) 56(30.1,-4) 57(30.1,-3) 58(30.1,-2) 59(30.1,-1) 60(30.1,0) 81(-0.1,-20) 82(30.1,-20) 85(30.1,1)
  rect 0.7x1.8 smd: 21(5.5,-24.6) 22(6.5,-24.6) 23(7.5,-24.6) 24(8.5,-24.6) 25(9.5,-24.6) 26(10.5,-24.6) 27(11.5,-24.6) 28(12.5,-24.6) 29(13.5,-24.6) 30(14.5,-24.6) 31(15.5,-24.6) 32(16.5,-24.6) 33(17.5,-24.6) 34(18.5,-24.6) 35(19.5,-24.6) 36(20.5,-24.6) 37(21.5,-24.6) 38(22.5,-24.6) 39(23.5,-24.6) 40(24.5,-24.6) 61(24.5,5.6) 62(23.5,5.6) 63(22.5,5.6) 64(21.5,5.6) 65(20.5,5.6) 66(19.5,5.6) 67(18.5,5.6) 68(17.5,5.6) 69(16.5,5.6) 70(15.5,5.6) 71(14.5,5.6) 72(13.5,5.6) 73(12.5,5.6) 74(11.5,5.6) 75(10.5,5.6) 76(9.5,5.6) 77(8.5,5.6) 78(7.5,5.6) 79(6.5,5.6) 80(5.5,5.6) 83(25.5,-24.6) 84(4.5,-24.6) 86(4.5,5.6) 87(25.5,5.6)
  silkscreen extent -2.41,-24.5 30,5.5
SIM_CARD1 [mm] "抽屉式SIM卡座"
  rect 3.3x1.4 smd: 1(0,0) 2(0,-2.5) 3(0,-5) 4(-24,0) 5(-24,-2.5) 6(-24,-5) ""(-24,-12.4) ""(0,-12.4)
  silkscreen extent -29,-14.6 3.86,10.03
SMB [mm]
  rect 2.2x2.75 smd: 1(0,0) 2(4.5,0)
  silkscreen extent -1.5,-1.7 6,1.7
SMC [mil]
  rect 99x130 smd: 1(0,0) 2(-267.72,0)
  silkscreen extent -280,-129 12,129
SO8 [mm] "Small Outline; 8 Leads; Body Width 3.9 mm; Pitch 1.27 mm"
  rect 0.6x2.2 smd: 1(-1.905,-2.6) 2(-0.635,-2.6) 3(0.635,-2.6) 4(1.905,-2.6) 5(1.905,2.6) 6(0.635,2.6) 7(-0.635,2.6) 8(-1.905,2.6)
  silkscreen extent -2.88,-2.72 2.5,1.1
SOD323 [mm]
  rect 1x1 smd: 1(-1.35,0) 2(1.35,0)
  silkscreen extent -2.1,-0.7 2.1,0.7
SOD323F [mm]
  rect 1x1 smd: 1(-1.35,0) 2(1.35,0)
  silkscreen extent -2.5,-0.7 2.1,0.7
SON [mm]
  rect 0.3x0.52 smd: 1(0,0) 2(0.5,0) 3(1,0) 4(1,0.8) 5(0.5,0.8) 6(0,0.8)
  silkscreen extent -0.1,-0.8 0.1,-0.6
SOT23-6 [mm]
  rect 0.5x1 smd: 1(0,0) 2(1,0) 3(2,0) 4(2,3) 5(1,3) 6(0,3)
  silkscreen extent -0.7,0.6 2.7,2.4
SOT753 [mm]
  rect 1x0.6 smd: 1(0,0)
  oval 1x0.6 smd: 2(0,-0.95) 3(0,-1.9) 4(3,-1.9) 5(3,0)
  silkscreen extent 0,-2.5 3,0.6
SUPERCAP [mm]
  round 1.8 hole 1: 1(-2.54,0) 2(2.54,0)
  silkscreen extent -6.5,-22 6.5,-1.3
TSOT23-8 [mm]
  rect 1.2x0.3 smd: 1(0,0)
  oval 1.2x0.3 smd: 2(0,-0.65) 3(0,-1.3) 4(0,-1.95) 5(2.6,-1.95) 6(2.6,-1.3) 7(2.6,-0.65) 8(2.6,0)
  silkscreen extent -1.2,-2.4 3.4,0.4
US8 [mm]
  rect 0.3x1.5 smd: 1(0,-0.1) 2(0.5,-0.1) 3(1,-0.1) 4(1.5,-0.1) 5(1.5,2.8) 6(1,2.8) 7(0.5,2.8) 8(0,2.8)
  silkscreen extent -0.4,-1.2 1.9,2.5
XH2.54-SMT-V-4P [mm]
  rect 1.2x4.5 smd: 1(0,0) 2(2.5,0) 3(5,0) 4(7.5,0)
  rect 1.6x3 smd: ""(-3.1,-5.7) ""(10.6,-5.7)
  silkscreen extent -3.7,-8.5 11.2,0
XH2.54-SMT-V-6P [mm]
  rect 1.2x4.5 smd: 1(0,0) 2(2.5,0) 3(5,0) 4(7.5,0) 5(10,0) 6(12.5,0)
  rect 1.6x3 smd: ""(-3.1,-5.7) ""(15.6,-5.7)
  silkscreen extent -3.7,-8.5 16.2,0

## Part data
C1 C2 C3 C4 C6 C7 C8 C9 C10 C12 C14 C15 C23 C24 C25 C27 C29 C33 C36 C39 C40 C41 C42: library part Cap, "Capacitor"
C5 C11 C16 C17 C19 C20 C22 C28 C30 C35 C45 C46: library part "CAP WP"
C13 C18 C21 C26 C31 C32 C34 C37 C38: library part "CAP NP_Dup2"
C43 C66 C67 C68: library part CAP_Dup1
C44 C47 C48 C49 C50 C51 C52 C53 C54 C55 C56 C57 C58 C59 C60 C61 C62 C63 C64 C65: library part "P_CAP NP"
D1: library part TVS-BI
D2 D3 D4 D5 D6 D7 D8 D10 D12 D13 D14: library part "Diode 11DQ03", "Schottky Rectifier"
D9 D11: library part MMGZ5231BPTLL34
D15 D21 D22 D23 D24: library part LN01401_1
D17 D18: library part PESD2CAN
D20: library part PESD
F1: library part 2A_32VDC_0467-002
J1: library part "Header 4", "Header, 4-Pin"
J2: library part "Header 2", "Header, 2-Pin"
J3 J5: library part HRS_U_0.FL-R-SMT-10
J6: library part "Header 3", "Header, 3-Pin"
J7: library part "Header 6", "Header, 6-Pin"
J8: library part FOX_UH51543-JS7
L1 L3 L4 L5 L6 L7: library part 4.7UH_CDH2D09BNP-4R7MC_0.7A_20%
L2: library part BNX002-01
L8: library part 2.2UH_LPS3015-222MLC_1.5A_20%~D
L9 L10: library part Inductor, "Inductor"
Q1 Q2 Q3 Q5: library part MMBT3904_NL_SOT23-3
Q4 Q7 Q8 Q9 Q10 Q11: library part MOSFET-N, "N-Channel MOSFET"
Q6: library part AO3401L_SOT23-3_0
R1 R2 R4 R6 R7 R11 R12 R13 R14 R23 R25 R37 R38 R39 R78 R79: library part Res3, "Resistor"
R3 R5 R8 R9 R10 R15 R16 R17 R18 R19 R20 R21 R22 R24 R26 R27 R29 R32 R36 R40 R41 R42 R44 R67 R68 R69 R70 R71 R72 R73: library part CR16-1003FM
R28 R30 R31 R33 R34 R35 R74 R75 R76 R77: library part R
R43 R45 R46 R47 R48 R49 R50 R51 R52 R53 R54 R55 R56 R57 R58 R59 R60 R61 R62 R63 R64 R65 R66: library part P_R
U1 U3: library part LM22670_0
U2 U4 U5: library part MP1482_5
U6: library part TPS3896
U11 U13: library part 74LVC1G04GW_SOT353-5
U14: library part NC7SZ74-US8_0, "IC;NC7SZ74,D-TYPE FLIP-FLOP,US8"
U15 U17: library part TPS27081A
U18: library part NEO-5M
U19 U21: library part TJA1040T_SO_8P, "IC XCVR CAN HS 5V SO8"

## Free pads (board coordinates)
  round 196.85 hole 118.11: MT1(196.85,255.91) MT2(5314.96,255.91) MT3(196.85,4980.31) MT4(5314.96,4980.31)
  round 40 smd: ""(2464.57,1921.26)

## Via types
v1: diameter 18, hole 8, Top Layer to Bottom Layer, tented both sides, 433 vias
v2: diameter 32, hole 16, Top Layer to Bottom Layer, tented both sides, 190 vias

## Nets (pads, with @x,y where several pads share a name; then routed paths per layer and width w, separated by ;. In a path a pad name is that pad's centre, name@x,y a point inside that pad or via, vN(x,y) a via of type N, cw(c..) or ccw(c..) an arc to the next point about the centre after c; other vN are vias at no path point)
ACC: R32.2 U9.4 U11.2 | length 317.5
  Top Layer w5: R32.2@3881.7,2287.4 3881.7,2271.46 3859.88,2249.65 U9.4@3859.88,2224.42 3885.81,2224.42 3901.57,2208.66 3901.57,2090.55 3931.1,2061.02 U11.2@3968.5,2061.02
ACC-INPUT: D9.1 J1.3 | length 252
  Top Layer w10: v1(751.97,263.78) J1.3@751.97,374.02
  Bottom Layer w10: v1(751.97,263.78) 751.97,255.91 809.06,198.82 D9.1@862.2,198.82
ACC-STATUS: M1.D29 R29.2 U8.4 | length 208
  Top Layer w5: U8.4@2982.64,2625.97 3015.75,2625.98 3019.68,2629.92 M1.D29@3188.98,2629.92
ANT: J3.1 U16.82 | length 212.6
  Top Layer w4.7: U16.82@4988.19,2771.65 J3.1@5200.79,2771.65
BM-SEL: J2.1 M1.B2 | length 2019
  Top Layer w5: v1(1000,3023.62) M1.B2@1062.99,3023.62
  Bottom Layer w5: J2.1@192.91,4354.33 86.61,4248.03 86.61,3783.46 188.98,3681.1 377.95,3681.1 551.18,3507.87 708.66,3507.87 811.02,3405.51 811.02,3259.84 1000,3070.87 v1(1000,3023.62)
CAN1-RX: M1.A30 U20.4 | length 4664.6
  Top Layer w5: M1.A30@1062.99,3712.6 1389.76,3712.6 1425.2,3677.17 1425.2,3464.57 2566.93,2322.83 2763.78,2322.83 3204.72,1881.89 4377.95,1881.89 4500,1759.84 4500,1515.75 4468.52,1484.27 U20.4@4468.52,1478.7
CAN1-TX: M1.A28 U19.1 | length 4675.4
  Top Layer w5: M1.A28@1062.99,3732.28 1409.45,3732.28 1452.76,3688.98 1452.76,3480.31 2578.74,2354.33 2779.53,2354.33 3228.35,1905.51 4385.83,1905.51 4519.68,1771.65 4519.68,1555.12 4531.3,1543.5 U19.1@4582.68,1543.5
CAN1_N: C58.1 D17.1 J7.5 R61.2 U19.6 | length 665.5
  Top Layer w15: U19.6@4787.4,1443.5 4838.21,1443.5 4850.71,1456 4905.51,1456 ; v1(4866.14,1425.2) 4866.58,1425.64 C58.1@4905.51,1425.64 4905.51,1456 ; J7.5@5094.49,1417.32 4998.41,1417.32 4959.72,1456 4905.51,1456
  Top Layer w20: J7.5@5094.49,1417.32 5224.41,1417.32 v2(5232.28,1425.2)
  Bottom Layer w15: v1(4866.14,1425.2) 4885.83,1405.51 R61.2@4921.26,1405.51
  Bottom Layer w20: v2(5232.28,1425.2) D17.1@5295.28,1425.2
CAN1_P: C54.2 D17.2 J7.6 R59.1 U19.7 | length 667.4
  Top Layer w15: U19.7@4787.4,1493.5 4838.21,1493.5 4850.71,1481 4905.51,1481 ; v1(4866.14,1511.81) 4866.33,1511.62 C54.2@4905.51,1511.62 4905.51,1481 ; J7.6@5094.49,1515.75 4998.41,1515.75 4963.66,1481 4905.51,1481
  Top Layer w20: J7.6@5094.49,1515.75 5216.54,1515.75 v2(5232.28,1500)
  Bottom Layer w15: v1(4866.14,1511.81) 4885.83,1531.5 R59.1@4921.26,1531.5
  Bottom Layer w20: v2(5232.28,1500) 5295.08,1500 D17.2@5295.28,1500.2
CAN2-RX: M1.A50 U22.4 | length 4806.1
  Top Layer w5: M1.A50@1062.99,3515.75 1287.4,3515.75 2543.31,2259.84 2736.22,2259.84 3161.42,1834.65 4244.09,1834.65 4291.34,1787.4 4291.34,1295.28 4362.2,1224.41 4460.63,1224.41 4496.06,1188.98 4496.06,1112.54 U22.4@4468.52,1085 U22.4@4468.52,1090.57
CAN2-TX: M1.A48 U21.1 | length 4819.2
  Top Layer w5: M1.A48@1062.99,3535.43 1311.02,3535.43 2555.12,2291.34 2751.97,2291.34 3185.04,1858.27 4255.91,1858.27 4314.96,1799.21 4314.96,1307.09 4374.02,1248.03 4468.5,1248.03 4515.75,1200.79 4515.75,1161.42 4527.36,1149.8 U21.1@4582.68,1149.8
CAN2_N: C64.1 D18.1 J7.1 R65.2 U21.6 | length 667.7
  Top Layer w15: U21.6@4787.4,1049.8 4838.21,1049.8 4850.71,1062.3 4905.51,1062.3 ; v1(4866.14,1031.5) 4866.58,1031.94 C64.1@4905.51,1031.94 4905.51,1062.3 ; J7.1@5094.49,1023.62 4998.41,1023.62 4998.41,1024.53 4960.63,1062.3 4905.51,1062.3
  Top Layer w20: J7.1@5094.49,1023.62 5220.47,1023.62 v2(5232.28,1035.43)
  Bottom Layer w15: v1(4866.14,1031.5) 4885.83,1011.81 R65.2@4921.26,1011.81
  Bottom Layer w20: v2(5232.28,1035.43) D18.1@5295.28,1035.43
CAN2_P: C60.2 D18.2 J7.2 R63.1 U21.7 | length 665.8
  Top Layer w15: U21.7@4787.4,1099.8 4838.21,1099.8 4850.71,1087.3 4905.51,1087.3 ; v1(4866.14,1118.11) 4866.33,1117.92 C60.2@4905.51,1117.92 4905.51,1087.3 ; J7.2@5094.49,1122.05 4998.41,1122.05 4963.66,1087.3 4905.51,1087.3
  Top Layer w20: J7.2@5094.49,1122.05 5220.47,1122.05 v2(5232.28,1110.24)
  Bottom Layer w15: v1(4866.14,1118.11) 4885.83,1137.8 R63.1@4921.26,1137.8
  Bottom Layer w20: v2(5232.28,1110.24) 5295.08,1110.24 D18.2@5295.28,1110.43
CHARGE: J1.4 R33.2 R34.1 | length 273.4
  Top Layer w10: J1.4@850.39,374.02 877.95,346.46 v1(909.45,346.46)
  Bottom Layer w10: R33.2@759.84,385.83 R33.2@779.53,405.51 R34.1@885.83,405.51 885.83,370.08 v1(909.45,346.46)
CORE-PWR: C16.1 L3.2 M1.D1 M1.D2 M1.D3 M1.D4 M1.D5 M1.D6 M1.D7 M1.D8 R9.1 R27.1 R31.1 R32.1 R38.1 U6.1 U6.6 U9.5 U10.5 U11.5 U12.5 U13.5 U14.8 | length 2637.2
  Top Layer w10: v1(2342.52,1854.33) 2346.46,1854.33 U6.6@2377.95,1822.83 U6.1@2377.95,1791.34 ; v1(3122.05,2846.46) M1.D7@3188.98,2846.46 v1(3240.16,2846.46) ; v1(3122.05,2866.14) M1.D5@3188.98,2866.14 v1(3240.16,2866.14) ; v1(3122.05,2885.83) M1.D3@3188.98,2885.83 v1(3240.16,2885.83) ; v1(3122.05,2905.51) M1.D1@3188.98,2905.51 v1(3240.16,2905.51) ; v1(3271.65,2846.46) M1.D8@3322.83,2846.46 v1(3385.83,2846.46) ; v1(3271.65,2866.14) M1.D6@3322.83,2866.14 v1(3385.83,2866.14) ; v1(3271.65,2885.83) M1.D4@3322.83,2885.83 v1(3385.83,2885.83) ; v1(3271.65,2905.51) M1.D2@3322.83,2905.51 v1(3385.83,2905.51) ; R38.1@3507.43,2283.46 3507.43,2318.46 v1(3507.87,2318.9) ; U13.5@3515.75,2023.62 v1(3555.12,2023.62) ; v1(3515.75,2137.8) U14.8@3515.75,2165.35 ; v1(3622.05,2370.08) U12.5@3622.05,2411.06 ; R9.1@3645.67,1653.98 v1(3645.67,1688.98) ; v1(3771.65,1980.31) U10.5@3771.65,2021.3 ; v1(3822.83,2173.23) U9.5@3859.88,2173.23 ; v1(3850.39,1980.31) U11.5@3850.39,2023.62 ; R32.1@3921.7,2287.4 v1(3960.63,2287.4) ; R31.1@4087.06,2007.87 v1(4122.05,2007.87) ; R27.1@4102.8,2212.6 v1(4137.8,2212.6)
  Bottom Layer w10: v1(2342.52,1854.33) 2980.31,1854.33 3062.99,1937.01 v1(3527.56,1937.01)
  other v2: 4066.93,1657.48 4114.17,1657.48 4161.42,1657.48 4208.66,1657.48 4066.93,1700.79 4114.17,1700.79 4161.42,1700.79 4208.66,1700.79 4066.93,1744.09 4114.17,1744.09 4161.42,1744.09 4208.66,1744.09
GND: C3.2 C5.2 C6.2 C7.2 C8.2 C9.2 C10.2 C11.2 C13.1 C15.2 C16.2 C18.1 C19.2 C21.1 C22.2 C25.2 C26.1 C27.1 C28.2 C29.1 C30.2 C31.1 C32.1 C34.1 C35.2 C36.2 C37.1 C38.1 C39.2 C40.2 C41.2 C42.2 C43.2 C45.2 C46.2 C47.2 C48.2 C49.2 C50.2 C52.2 C53.2 C54.1 C55.2 C56.2 C57.2 C58.2 C59.2 C60.1 C61.2 C62.2 C63.2 C64.2 C65.2 C66.1 C68.1 D6.1 D8.1 D10.1 D12.1 D16.2 D17.3 D18.3 D19.2 J1. J2.2 J3.2 J3.3 J4.4 J5.2 J5.3 J6.3 J7. J7.3 J7.4 L2.4 L2.5 L2.6 L10.1 M1.A5 M1.A11 M1.A17 M1.A25 M1.A31 M1.A37 M1.A43 M1.A49 M1.A55 M1.A56 M1.A57 M1.A58 M1.A59 M1.A60 M1.B27 M1.B55 M1.B56 M1.B57 M1.B58 M1.B59 M1.B60 M1.C47 M1.C52 M1.C53 M1.C54 M1.C56 M1.D26 M1.D28 M1.D30 M1.D31 M1.D33 M1.D45 M1.D47 M1.D58 M1.D59 M1.MT5 M1.MT6 M1.MT7 M1.MT8 pad.MT1 pad.MT2 pad.MT3 pad.MT4 Q1.3 Q2.3 Q3.3 Q4.3 Q5.3 Q7.3 Q8.3 Q9.3 Q10.3 Q11.3 R1.2 R10.2 R12.2 R13.2 R18.2 R19.2 R24.2 R25.2 R30.2 R35.2 R36.2 R39.2 R41.2 R45.1 R46.1 R48.1 R49.1 R52.1 R53.1 R57.1 R62.2 R66.2 R68.1 R69.2 R74.1 R75.1 R76.1 R77.1 R78.2 R79.2 U1.6 U1.9 U2.4 U3.6 U3.9 U4.4 U5.4 U6.2 U7.2 U7.3 U8.2 U8.3 U9.3 U10.3 U11.3 U12.3 U13.3 U14.1 U14.2 U14.4 U16.1 U16.2 U16.5 U16.10 U16.14 U16.37 U16.40 U16.41 U16.43 U16.57 U16.58 U16.60 U16.61 U16.64 U16.65 U16.77 U16.78 U16.80 U16.81 U18.10 U18.12 U18.13 U18.24 U19.2 U20.3 U21.2 U22.3 | length 7169.4
  Top Layer w10: v1(862.2,3417.32) M1.A59@929.13,3417.32 v1(984.25,3417.32) ; v1(862.2,3437.01) M1.A57@929.13,3437.01 v1(984.25,3437.01) ; v1(862.2,3456.69) M1.A55@929.13,3456.69 v1(984.25,3456.69) ; v1(862.2,3515.75) M1.A49@929.13,3515.75 v1(984.25,3515.75) ; v1(862.2,3574.8) M1.A43@929.13,3574.8 v1(984.25,3574.8) ; v1(862.2,3633.86) M1.A37@929.13,3633.86 v1(984.25,3633.86) ; v1(862.2,3692.91) M1.A31@929.13,3692.91 v1(984.25,3692.91) ; v1(862.2,3751.97) M1.A25@929.13,3751.97 v1(984.25,3751.97) ; v1(862.2,3830.71) M1.A17@929.13,3830.71 v1(984.25,3830.71) ; v1(862.2,3889.76) M1.A11@929.13,3889.76 v1(984.25,3889.76) ; v1(862.2,3948.82) M1.A5@929.13,3948.82 v1(984.25,3948.82) ; v1(866.14,2452.76) M1.B59@929.13,2452.76 v1(980.32,2452.76) ; v1(866.14,2472.44) M1.B57@929.13,2472.44 v1(980.32,2472.44) ; v1(866.14,2492.13) M1.B55@929.13,2492.13 v1(980.32,2492.13) ; v1(866.14,2767.72) M1.B27@929.13,2767.72 v1(980.32,2767.72) ; v1(1011.81,2452.76) M1.B60@1062.99,2452.76 v1(1125.98,2452.76) ; v1(1011.81,2472.44) M1.B58@1062.99,2472.44 v1(1125.98,2472.44) ; v1(1011.81,2492.13) M1.B56@1062.99,2492.13 v1(1125.98,2492.13) ; v1(1011.81,3417.32) M1.A60@1062.99,3417.32 v1(1125.98,3417.32) ; v1(1011.81,3437.01) M1.A58@1062.99,3437.01 v1(1125.98,3437.01) ; v1(1011.81,3456.69) M1.A56@1062.99,3456.69 v1(1125.98,3456.69) ; v1(2397.64,1759.84) U6.2@2397.64,1791.34 ; v1(3122.05,2334.65) M1.D59@3188.98,2334.65 v1(3240.16,2334.65) ; v1(3122.05,2452.76) M1.D47@3188.98,2452.76 v1(3240.16,2452.76) ; v1(3122.05,2472.44) M1.D45@3188.98,2472.44 v1(3240.16,2472.44) ; v1(3122.05,2590.55) M1.D33@3188.98,2590.55 v1(3240.16,2590.55) ; v1(3122.05,2610.24) M1.D31@3188.98,2610.24 v1(3240.16,2610.24) ; v1(3125.98,3594.49) M1.C53@3188.98,3594.49 v1(3244.09,3594.49) ; v1(3125.98,3653.54) M1.C47@3188.98,3653.54 v1(3244.09,3653.54) ; v1(3271.65,2354.33) M1.D58@3322.83,2354.33 v1(3385.83,2354.33) ; v1(3271.65,2629.92) M1.D30@3322.83,2629.92 v1(3385.83,2629.92) ; v1(3271.65,2649.61) M1.D28@3322.83,2649.61 v1(3385.83,2649.61) ; v1(3271.65,2669.29) M1.D26@3322.83,2669.29 v1(3385.83,2669.29) ; v1(3271.65,3574.8) M1.C56@3322.83,3574.8 v1(3385.83,3574.8) ; v1(3271.65,3594.49) M1.C54@3322.83,3594.49 v1(3385.83,3594.49) ; v1(3271.65,3614.17) M1.C52@3322.83,3614.17 v1(3385.83,3614.17) ; U14.1@3629.92,2165.35 3661.42,2165.35 v1(3681.1,2185.04) U14.2@3629.92,2185.04 ; U14.4@3629.92,2224.41 v1(3681.1,2224.41)
  Top Layer w15: U1.6@1647.24,690.55 U1.9@1731.5,690.55 ; U3.6@1647.24,1462.2 U3.9@1731.5,1462.2 ; R78.2@2008.06,653.54 v1(2047.24,653.54) ; R79.2@2008.06,1429.13 v1(2043.31,1429.13) ; v1(2854.33,2653.54) 2856.31,2651.57 U8.2@2897.64,2651.57 ; v1(2854.33,2625.98) U8.3@2897.64,2625.97 ; v1@2858.28,2346.44 U7.3@2897.64,2346.44 ; v1(2858.27,2374.02) 2860.24,2372.04 U7.2@2897.64,2372.04 ; C31.1@2913.39,1445.32 v1(2913.39,1484.25) ; v1(2948.82,1578.74) R18.2@2948.82,1613.98 ; C32.1@3043.31,1653.98 v1(3043.31,1688.98) ; U4.4@3061.02,1405.51 3061.02,1450.79 v1(3062.99,1452.76) ; R19.2@3090.55,1653.73 v1(3090.55,1688.98) ; v1(3539.37,2507.87) 3551.18,2496.06 U12.3@3570.85,2496.06 ; v1(3574.8,2716.54) 3576.06,2715.28 Q4.3@3576.06,2682.67 ; U13.3@3633.86,2098.43 v1(3677.17,2098.43) 3685.04,2106.3 U10.3@3720.46,2106.3 ; v1(3633.86,2696.85) 3635.12,2695.59 R39.2@3635.12,2662.98 ; C42.2@3645.86,2283.46 v1(3681.1,2283.46) ; C18.1@3661.42,1445.32 v1(3661.42,1480.31) ; v1(3688.98,1578.74) R10.2@3688.98,1613.98 ; R36.2@3724.22,2165.35 3724.22,2200.6 v1(3724.41,2200.79) ; C21.1@3775.59,1653.98 v1(3775.59,1688.98) ; U2.4@3809.06,1405.51 3809.06,1438.98 v1(3818.9,1448.82) ; U9.3@3944.88,2224.42 v1(3984.25,2224.41) ; U11.3@3968.5,2098.43 v1(4007.87,2098.43) ; Q3.3@4122.24,2066.93 v1(4165.35,2066.93) ; C62.2@4354.33,1039.56 v1(4354.33,1074.8) ; C56.2@4354.33,1433.26 v1(4354.33,1468.5) ; v1(4393.7,2271.65) R46.1@4432.44,2271.65 ; v1(4464.57,1185.04) 4464.76,1184.85 C63.2@4464.76,1145.67 ; v1(4464.57,1574.8) 4464.76,1574.61 C57.2@4464.76,1539.37 ; v1@4468.52,960.64 U22.3@4468.52,1000 ; v1@4468.52,1358.28 U20.3@4468.52,1393.7 ; v1(4515.75,1098.43) 4517.13,1099.8 U21.2@4582.68,1099.8 4652.17,1099.8 v1(4653.54,1098.43) ; v1(4515.75,1492.13) 4517.13,1493.5 U19.2@4582.68,1493.5 4648.23,1493.5 v1(4649.61,1492.13) ; C37.1@4539.37,445.32 v1(4539.37,480.32) ; v1(4574.8,578.74) R24.2@4574.8,613.98 ; v1(4586.61,2173.23) R45.1@4625.54,2173.23 ; C38.1@4669.29,653.98 v1(4669.29,688.98) ; U5.4@4687.01,405.51 4687.01,438.98 v1(4692.91,444.88) ; v1(4708.66,1220.47) R66.2@4747.84,1220.47 ; v1(4712.6,1614.17) R62.2@4747.84,1614.17
  Top Layer w20: 4625.98,3700.79 4649.61,3724.41 U16.64@4649.61,3779.53 ; v2@4637.8,2519.69 4649.61,2531.5 U16.37@4649.61,2590.55 4649.61,2653.54 v2(4637.8,2665.35) ; U16.61@4767.72,3779.53 4767.72,3720.47 4779.53,3708.66 ; v2(4779.53,2665.35) 4767.72,2653.54 U16.40@4767.72,2590.55 4767.72,2535.43 4783.46,2519.69
  Bottom Layer w15: R30.2@1039.37,200.98 v1(1039.37,236.22) ; v1(1039.37,531.5) R35.2@1039.37,492.31 1047.43,492.31 1078.74,523.62 C41.2@1106.3,523.62 ; C40.2@1106.3,232.28 v1(1106.3,275.59) ; Q1.3@1181.1,240.35 v1(1181.1,275.59) ; D10.1@1220.47,86.61 v1(1267.72,86.61) ; D12.1@1220.47,377.95 v1(1267.72,377.95)
  Bottom Layer w20: C41.2@1110.43,527.76 Q2.3@1181.1,527.76 ; v1(1972.44,4940.94) v1(1992.13,4940.94) D19.2@2027.56,4940.94
  other v1: 4547.24,94.49 4574.8,94.49 4602.36,94.49 1070.87,515.75 1145.67,527.56 4791.34,657.48 4818.9,657.48 4846.46,657.48 4874.02,657.48 4791.34,688.98 4818.9,688.98 4846.46,688.98 4874.02,688.98 4204.72,732.28 4204.72,759.84 4204.72,787.4 4905.51,940.94 4468.5,960.63 4692.91,1129.92 4905.51,1208.66 4960.63,1220.47 5208.66,1220.47 5236.22,1220.47 2787.4,1228.35 3531.5,1232.28 2787.4,1255.91 3531.5,1259.84 2787.4,1283.46 3531.5,1287.4 2787.4,1311.02 3531.5,1314.96 5208.66,1318.9 5236.22,1318.9 4905.51,1334.65 4468.5,1358.27 2043.31,1523.62 4692.91,1523.62 4905.51,1598.43 4960.63,1614.17 1204.72,1633.86 3169.29,1661.42 3196.85,1661.42 3224.41,1661.42 3251.97,1661.42 3909.45,1665.35 3937.01,1665.35 3964.57,1665.35 3992.13,1665.35 2342.52,1677.17 1129.92,1681.1 1153.54,1681.1 3169.29,1692.91 3196.85,1692.91 3224.41,1692.91 3251.97,1692.91 3909.45,1696.85 3937.01,1696.85 3964.57,1696.85 3992.13,1696.85 2342.52,1724.41 4854.33,1901.57 4885.83,1901.57 4917.32,1901.57 4948.82,1901.57 4980.32,1901.57 5192.91,1901.57 5224.41,1901.57 5255.91,1901.57 5287.4,1901.57 5318.9,1901.57 338.58,1929.13 4854.33,1933.07 4885.83,1933.07 4917.32,1933.07 4948.82,1933.07 4980.32,1933.07 5192.91,1933.07 5224.41,1933.07 5255.91,1933.07 5287.4,1933.07 5318.9,1933.07 2397.64,1956.69 393.7,1968.5 421.26,1968.5 263.78,2307.09 307.09,2307.09 350.39,2307.09 393.7,2307.09 2858.27,2346.46 220.47,2354.33 433.07,2354.33 220.47,2393.7 433.07,2393.7 220.47,2433.07 433.07,2433.07 220.47,2472.44 433.07,2472.44 287.4,2515.75 370.08,2515.75 291.34,2625.98 366.14,2625.98 291.34,2665.35 366.14,2665.35 5224.41,2665.35 5259.84,2665.35 5295.28,2665.35 5188.98,2692.91 110.24,2696.85 236.22,2696.85 271.65,2696.85 582.68,2696.85 712.6,2696.85 366.14,2704.72 5346.46,2704.72 5062.99,2724.41 5106.3,2724.41 5149.61,2724.41 5346.46,2736.22 354.33,2740.16 322.83,2767.72 5346.46,2771.65 110.24,2783.46 236.22,2783.46 271.65,2783.46 5062.99,2807.09 5106.3,2807.09 5149.61,2807.09 5346.46,2807.09 5346.46,2842.52 5188.98,2846.46 5224.41,2877.95 5259.84,2877.95 5295.28,2877.95 78.74,2913.39 708.66,3248.03 740.16,3283.46 653.54,3291.34 751.97,3374.02 751.97,3397.64 3594.49,3480.31 2881.89,3492.13 417.32,3543.31 2881.89,3570.87 519.69,3736.41 2417.32,3744.09 2291.34,3854.33 2216.54,4043.31 2216.54,4236.22 4484.25,4295.28 4582.68,4295.28 4681.1,4295.28 2527.76,4393.7 2216.54,4413.39 2551.38,4460.63 1940.94,4649.61 1972.44,4649.61 2003.94,4649.61 4562.99,4653.54 2421.26,4673.23 2452.76,4673.23 1940.94,4677.17 1972.44,4677.17 2003.94,4677.17 4562.99,4677.17 4562.99,4700.79 2421.26,4704.72 2452.76,4704.72 511.81,4740.16 740.16,4740.16 968.5,4740.16 1200.79,4740.16 1429.13,4740.16 535.43,4799.21 755.91,4799.21 988.19,4799.21 1220.47,4799.21 1448.82,4799.21 4484.25,4811.02 1649.61,4921.26 1673.23,4921.26 1649.61,4972.44 1673.23,4972.44 4665.35,5133.86 4692.91,5133.86
  other v2: 1889.76,62.99 1937.01,62.99 1984.25,62.99 1456.69,102.36 1500,102.36 1543.31,102.36 1889.76,106.3 1937.01,106.3 1984.25,106.3 1456.69,145.67 1500,145.67 1543.31,145.67 1728.35,625.98 1783.46,625.98 1728.35,665.35 1783.46,665.35 1728.35,704.72 1783.46,704.72 850.39,708.66 897.64,708.66 944.88,708.66 996.06,708.66 850.39,759.84 897.64,759.84 944.88,759.84 996.06,759.84 1456.69,791.34 1500,791.34 1543.31,791.34 2043.31,795.28 2090.55,795.28 2137.8,795.28 2043.31,838.58 2090.55,838.58 2137.8,838.58 1456.69,874.02 1500,874.02 1543.31,874.02 1456.69,917.32 1500,917.32 1543.31,917.32 5444.88,1023.62 5444.88,1070.87 5444.88,1118.11 850.39,1145.67 897.64,1145.67 944.88,1145.67 996.06,1145.67 850.39,1196.85 897.64,1196.85 944.88,1196.85 996.06,1196.85 1728.35,1397.64 1783.46,1397.64 5444.88,1413.39 1728.35,1437.01 1783.46,1437.01 5444.88,1460.63 1728.35,1476.38 1783.46,1476.38 5444.88,1507.87 1452.76,1566.93 1496.06,1566.93 1539.37,1566.93 996.06,1763.78 1039.37,1763.78 1082.68,1763.78 476.38,2059.06 519.69,2059.06 562.99,2059.06 4625.98,2515.75 4803.15,2515.75 3877.95,2685.04 3728.35,2755.91 4905.51,2811.02 4905.51,2889.76 5066.93,2889.76 3724.41,3047.24 3870.08,3047.24 3724.41,3204.72 3870.08,3204.72 3724.41,3401.57 3870.08,3401.57 4905.51,3440.94 5066.93,3440.94 4905.51,3480.31 5066.93,3480.31 3724.41,3519.68 3870.08,3519.68 3870.08,3559.06 4905.51,3559.06 5066.93,3559.06 3870.08,3598.43 4019.68,3696.85 4098.43,3696.85 4137.8,3696.85 4610.24,3696.85 4803.15,3704.72 4019.68,3858.27 4098.43,3858.27 4137.8,3858.27 4610.24,3858.27 4649.61,3858.27 4767.72,3858.27
GPS-PWR: C51.1 C52.1 C53.1 R54.2 R55.2 U17.2 U17.3 U18.23 | length 515.4
  Top Layer w10: v1(771.65,2818.9) 771.84,2818.71 R55.2@771.84,2783.46 R54.2@771.84,2736.22
  Bottom Layer w10: v1(708.66,3204.72) 708.66,2846.46 736.22,2818.9 v1(771.65,2818.9)
GPS-PWREN: M1.A44 R53.2 U17.5 | length 692.1
  Top Layer w5: U17.5@527.56,3586.61 v1(527.56,3622.05) 519.68,3629.92 R53.2@519.68,3657.48 R53.2@527.56,3649.61 ; v1(1007.87,3551.18) 1007.87,3562.99 1019.68,3574.8 M1.A44@1062.99,3574.8
  Bottom Layer w5: v1(527.56,3622.05) 527.56,3578.74 555.12,3551.18 v1(1007.87,3551.18)
LED1: M1.D41 Q8.2 R74.2 | length 3341.3
  Top Layer w5: Q8.2@1338.49,4791.43 1350.2,4779.72 R74.2@1350.2,4740.16 1350.2,4559.24 1653.54,4255.91 1653.54,3543.31 2685.04,2511.81 M1.D41@3188.98,2511.81
LED2: M1.D51 Q9.2 R75.2 | length 3623.7
  Top Layer w5: Q9.2@1102.36,4799.21 1121.86,4779.72 R75.2@1121.86,4740.16 1121.86,4614.36 1200.79,4535.43 v1(1307.09,4535.43) ; v1(1307.09,4476.38) 1354.33,4476.38 1606.3,4224.41 1606.3,3511.81 2645.67,2472.44 3047.24,2472.44 3106.3,2413.39 M1.D51@3188.98,2413.39
  Bottom Layer w5: v1(1307.09,4476.38) v1(1307.09,4535.43)
LED3: M1.D43 Q10.2 R76.2 | length 3733.6
  Top Layer w5: Q10.2@870.08,4799.21 889.57,4779.72 R76.2@889.57,4740.16 889.57,4708.66 913.2,4685.04 1000,4685.04 1181.1,4503.94 1366.14,4503.94 1629.92,4240.16 1629.92,3527.56 2665.35,2492.13 M1.D43@3188.98,2492.13
LED4: M1.D53 Q11.2 R77.2 | length 4018.1
  Top Layer w5: Q11.2@637.8,4799.21 657.29,4779.72 R77.2@657.29,4740.16 657.29,4689.17 708.66,4637.8 984.25,4637.8 1173.23,4448.82 1346.46,4448.82 1582.68,4212.6 1582.68,3500 2629.92,2452.76 3039.37,2452.76 3098.43,2393.7 M1.D53@3188.98,2393.7
LIGHT: R47.1 U16.51 | length 7597.4
  Top Layer w5: v1(472.44,4645.67) 472.44,4692.47 R47.1@472.88,4692.91 ; U16.51@4988.19,3204.72 v1(5066.93,3204.72)
  Bottom Layer w5: v1(472.44,4645.67) 452.76,4665.35 452.76,5098.43 527.56,5173.23 3397.64,5173.23 3637.8,4933.07 3637.8,2905.51 3700.79,2842.52 3795.28,2842.52 3870.08,2767.72 4153.54,2767.72 4590.55,3204.72 v1(5066.93,3204.72)
M3V3: C44.1 C45.1 C46.1 R44.1 R50.1 U15.2 U15.3 U16.38 U16.39 U16.62 U16.63 | length 6538.5
  Top Layer w4.7: v1(3586.61,3165.35) R50.1@3629.48,3165.35
  Bottom Layer w20: R44.1@500,4901.13 534.99,4901.13 562.99,4929.13 562.99,5086.61 610.24,5133.86 3314.96,5133.86 3551.18,4897.64 3551.18,3200.79 v1(3586.61,3165.35) 3586.61,2897.64 3677.17,2807.09 3771.65,2807.09 3846.46,2732.28 v1(4661.42,2732.28)
MAIN-PWR: C13.2 C26.2 C34.2 D4.2 D7.2 R5.2 U2.2 U4.2 U5.2 | length 63.4
  Top Layer w10: v1(3751.97,1456.69) 3751.97,1440.94 3759.84,1433.07
  Bottom Layer w10: v1(3751.97,1456.69) 3763.97,1444.69 R5.2@3783.46,1444.69
MODEM-PWR: M1.A20 R46.2 U15.5 | length 4235.3
  Top Layer w5: M1.A20@1062.99,3811.02 v1(1287.4,3811.02) ; v1(1807.09,3811.02) 2602.36,3015.75 3405.51,3015.75 3748.03,2673.23 3748.03,2515.75 3850.39,2413.39 4098.43,2413.39 4259.84,2251.97 4452.76,2251.97 R46.2@4472.44,2271.65 4500,2271.65 4511.81,2283.46 U15.5@4547.24,2283.46
  Bottom Layer w5: v1(1287.4,3811.02) v1(1807.09,3811.02)